# Altium PCB PCB.PcbDoc (part 1 of 4)
Units mm, origin at the board's own origin, x right, y up, seen from the top; angles counter-clockwise.
Board outline 86.25 x 140 mm, 4 copper layers (Top Layer, GND, PWR, Bottom Layer), stack 1.57 mm thick; 308 components, 255 nets, 1064 pads, 1223 vias.
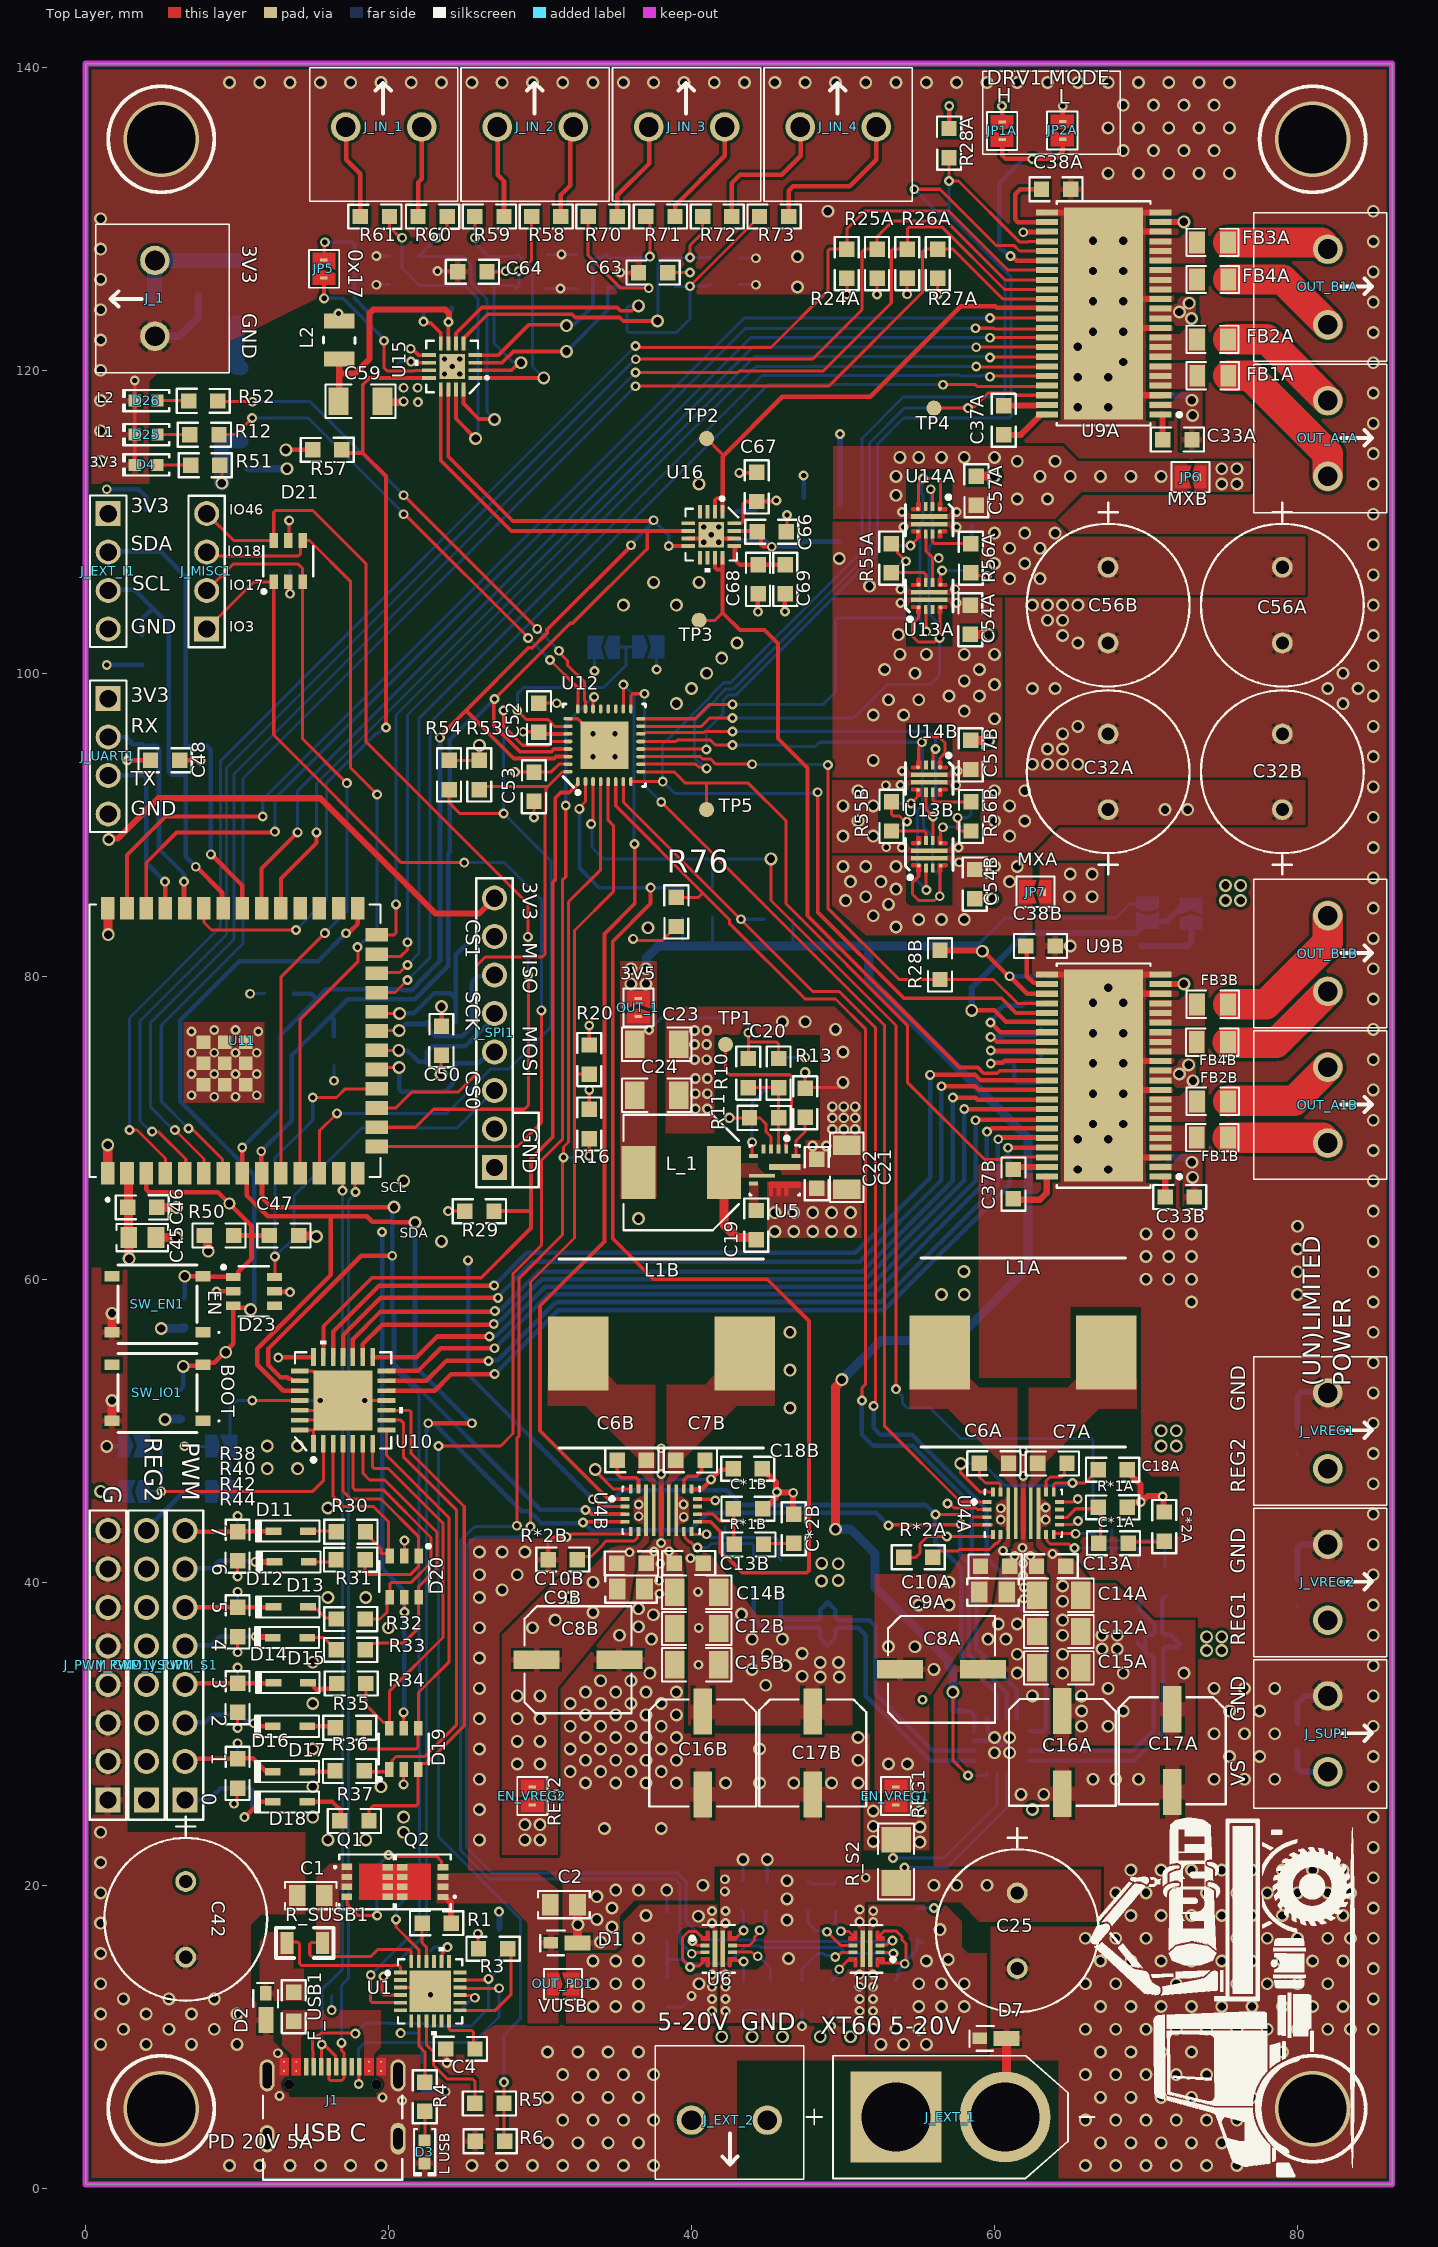
[diagram p0: Top Layer view]
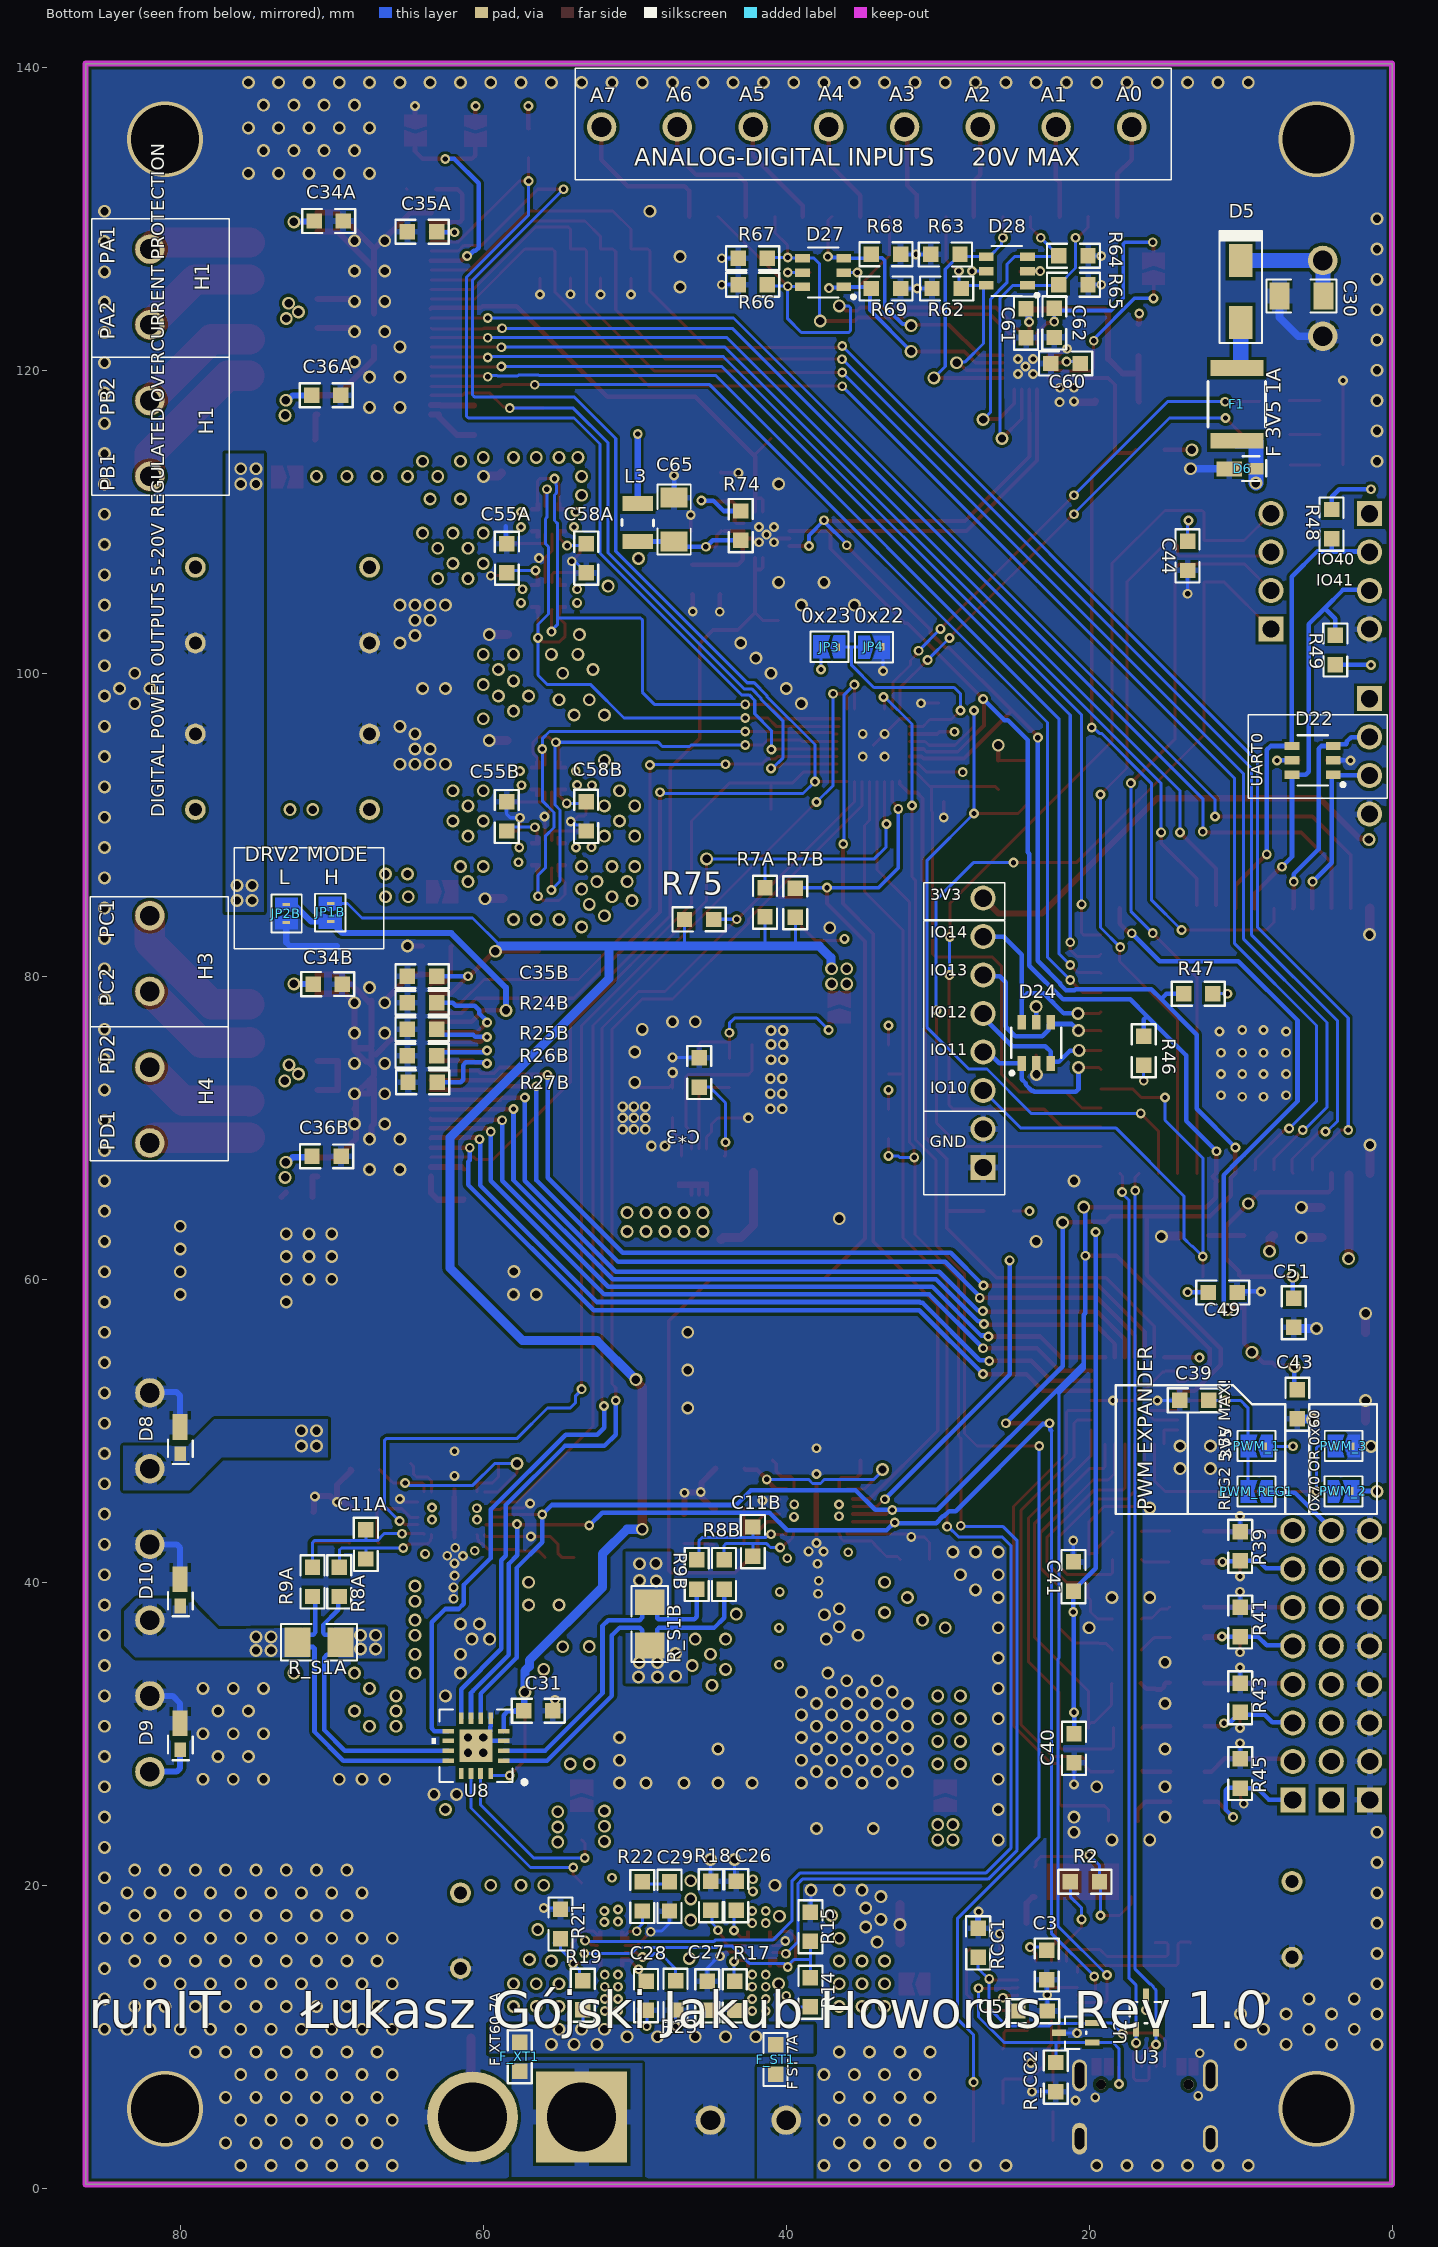
[diagram p1: Bottom Layer view, seen from below]
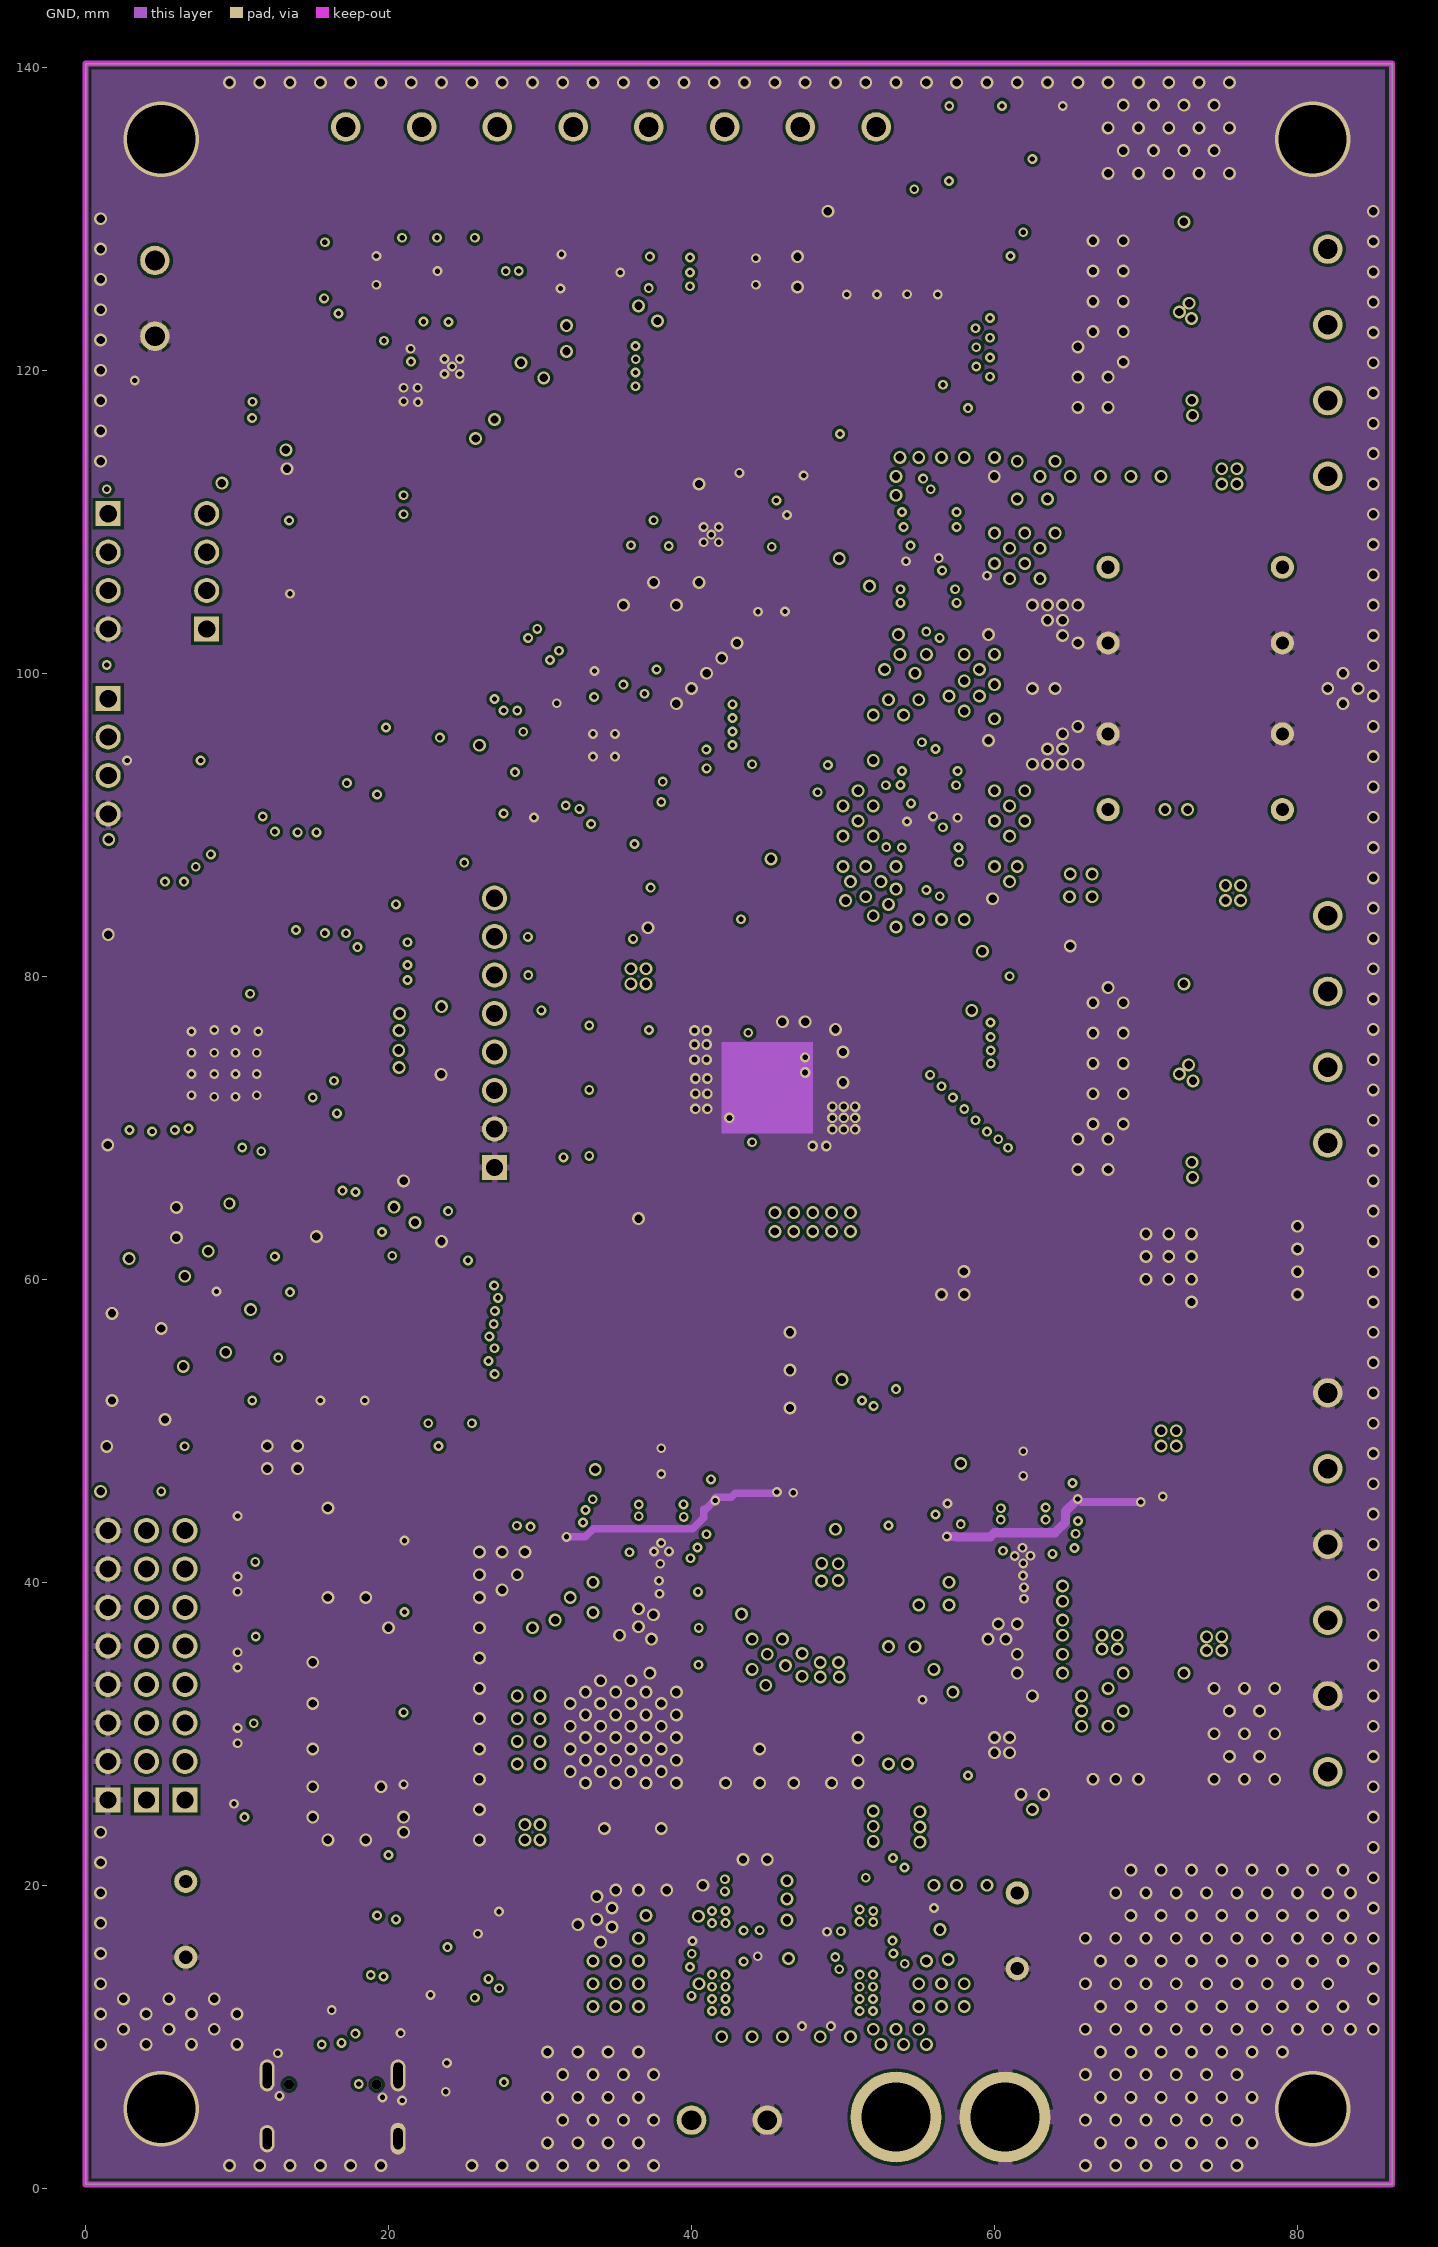
[diagram p2: GND]
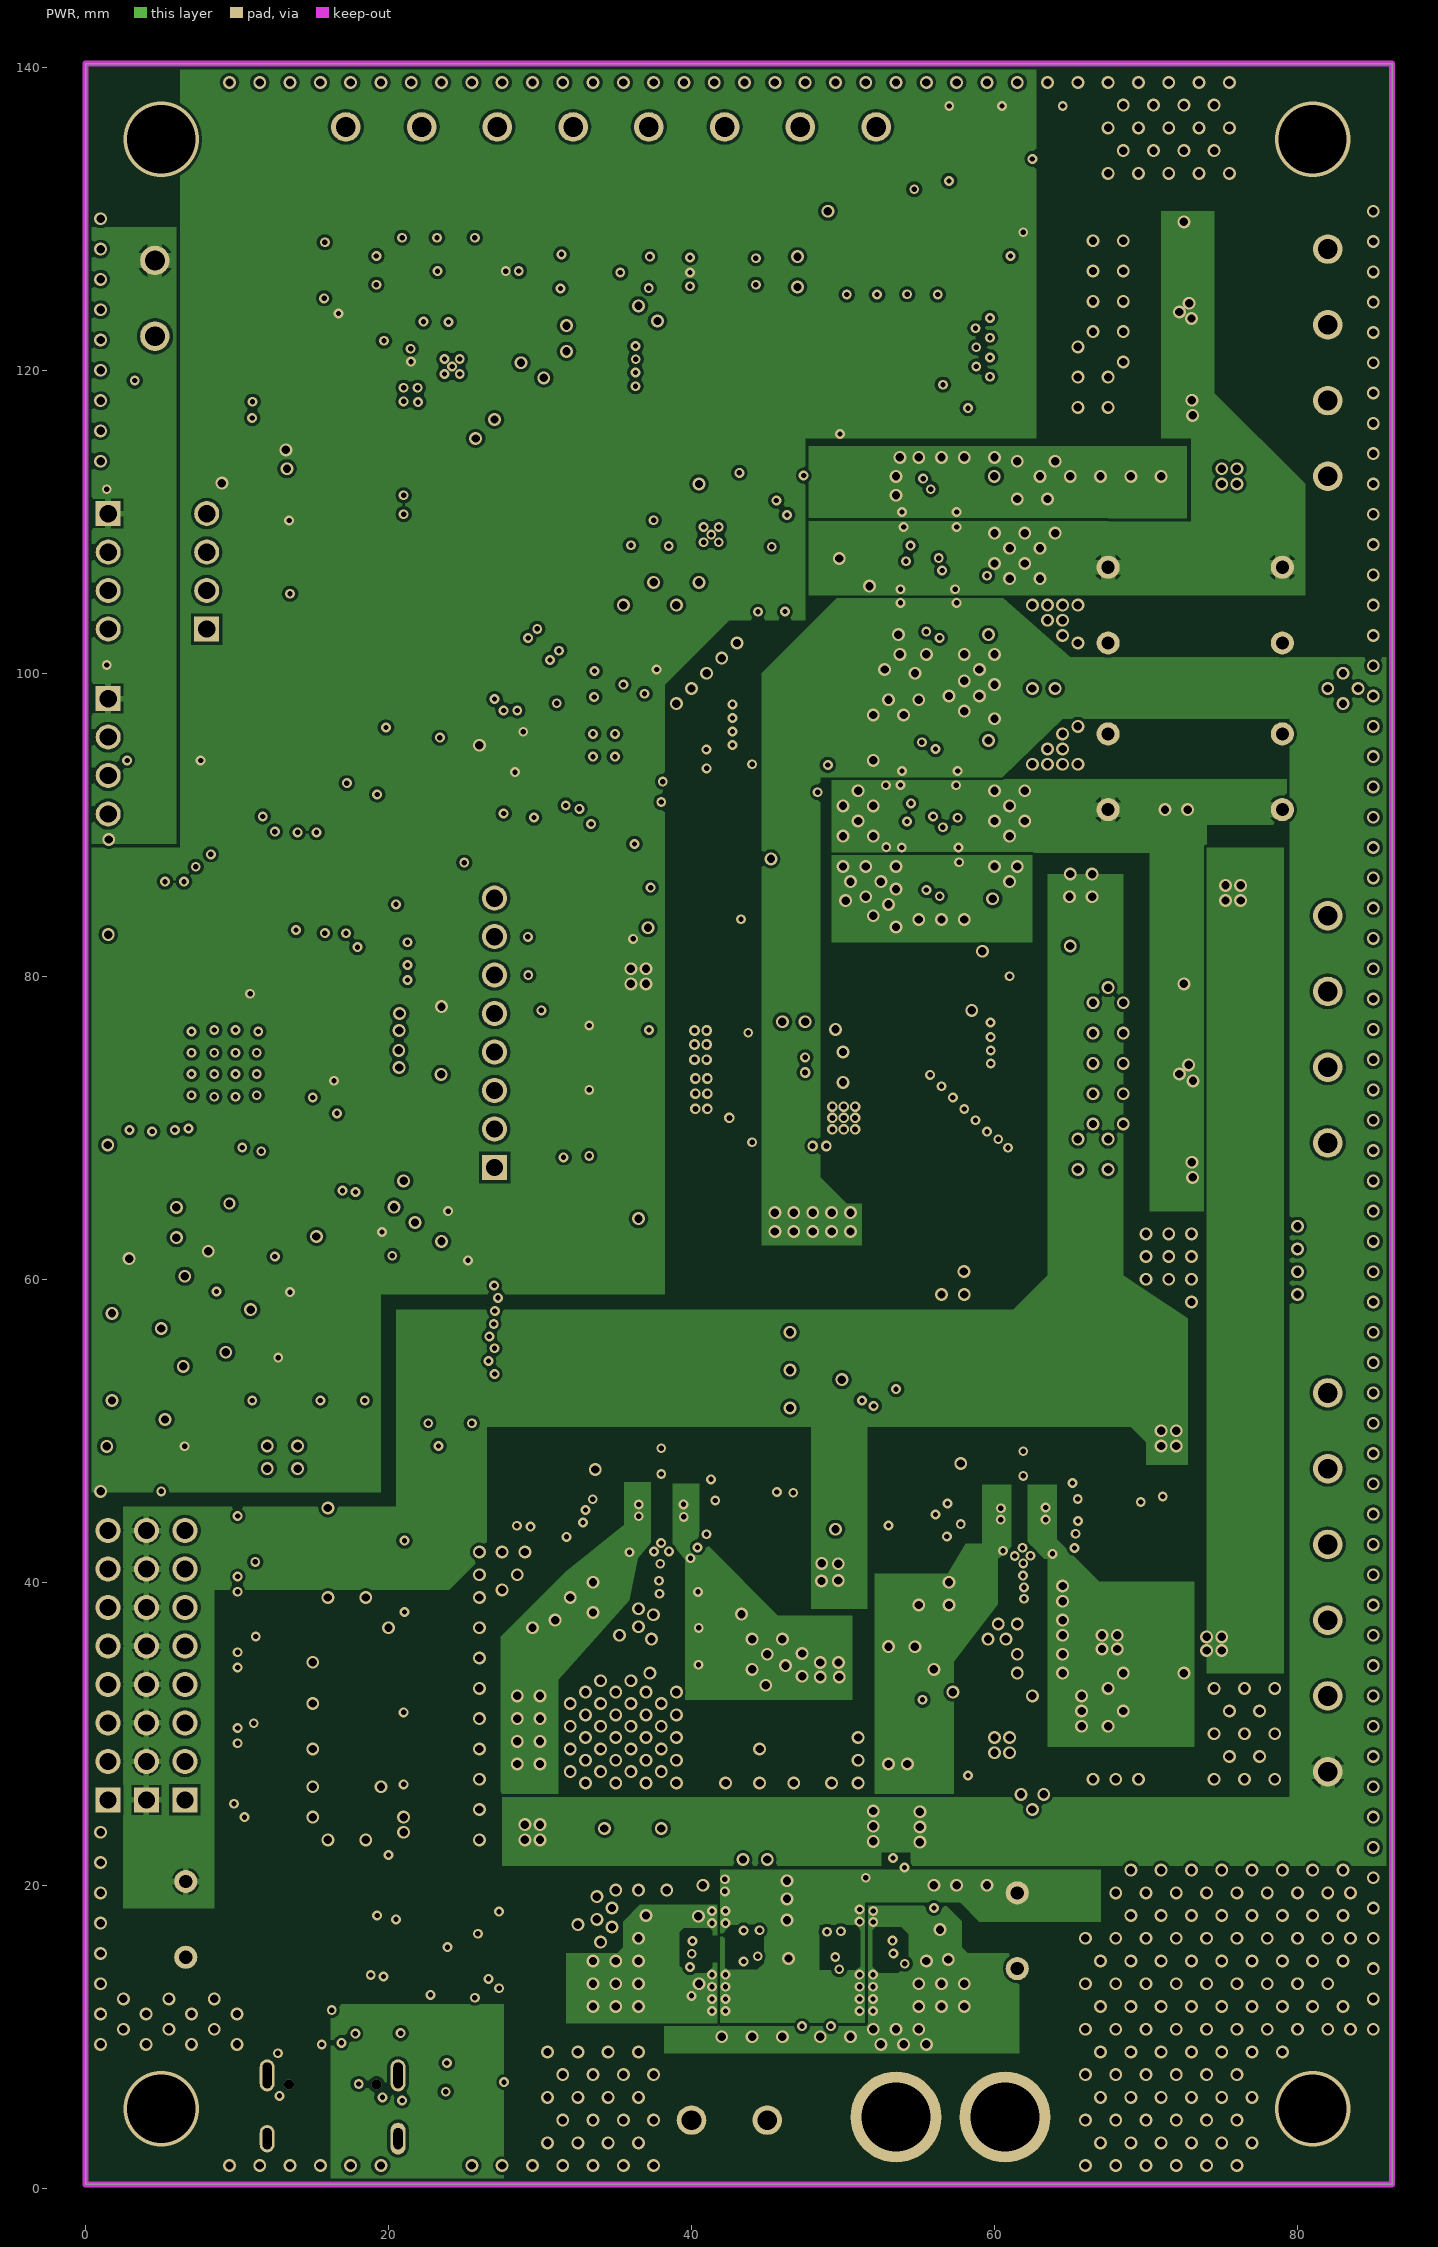
[diagram p3: PWR]

## Layer stack, top to bottom
Top Solder: solder mask 0.0127, Solder Resist, Dk 3.8
Top Layer: signal copper 0.035
Dielectric 1: prepreg 0.2, 7628, Dk 4.6
GND: signal copper 0.0175
Core: core 1.065, FR-4, Dk 4.5
PWR: signal copper 0.0175
Dielectric 2: prepreg 0.2, 7628, Dk 4.6
Bottom Layer: signal copper 0.035
Bottom Solder: solder mask 0.0127, Solder Resist, Dk 3.8

## Board outline
0,0.25 0,140.25 86.25,140.25 86.25,0.25

## Design rules (kind name [scope] priority, off if disabled: settings)
BoardOutlineClearance [All] p1: gap=0.2 ignorepadtopadclearanceinfootprint=FALSE
Clearance "Stitching GND" [IsStitchingVia and InNet('GND') vs (IsVia and (Not IsStitchingVia)) Or IsPad] p1: gap=0.127 ignorepadtopadclearanceinfootprint=FALSE
Clearance Clearance_safe [All] p2 off: gap=0.2 ignorepadtopadclearanceinfootprint=TRUE except(0.25: Arc-Hole Track-Hole SMDPad-Hole THPad-Hole Via-Hole Fill-Hole Poly-Hole Region-Hole Text-Hole)
Clearance Clearance_min [All] p3: gap=0.2 ignorepadtopadclearanceinfootprint=TRUE
ComponentClearance Allow_Goldpins_Touch [HasFootprint('GOLDPIN8') vs HasFootprint('GOLDPIN8')] p1: gap=-10 collisioncheckmode=3 verticalgap=2540 showdistances=FALSE
ComponentClearance Allow_TerminalBlock_Overlap [HasFootprint('TB00150002BE') vs HasFootprint('TB00150002BE')] p2: gap=-1 collisioncheckmode=3 verticalgap=0 showdistances=TRUE
ComponentClearance [All] p3: gap=0.254 collisioncheckmode=3 verticalgap=0.254 showdistances=FALSE
DiffPairsRouting [All] p1: maxlimit=0.2 minlimit=0.102 mostfreqgap=0.2 toplayer_mingap=0.2 toplayer_minwidth=0.2 toplayer_maxwidth=0.2 toplayer_prefwidth=0.2 midlayer1_maxgap=0.102 midlayer1_prefgap=0.102 midlayer1_minwidth=0.102 midlayer1_maxwidth=1816.048 midlayer1_prefwidth=0.102 midlayer2_maxgap=0.102 midlayer2_prefgap=0.102 midlayer2_minwidth=0.102 midlayer2_maxwidth=1816.048 midlayer2_prefwidth=0.102 bottomlayer_mingap=0.2 bottomlayer_minwidth=0.2 bottomlayer_maxwidth=1816.048 bottomlayer_prefwidth=0.2 maxuncoupledlength=20
Height [All] p1: minheight=0 maxheight=1816.048 prefheight=12.7
HoleSize [All] p1: absolutevalues=TRUE maxlimit=6.3 minlimit=0.15 maxpercent=80.000 minpercent=20.000
HoleToHoleClearance [All] p1: gap=0.25 allowstackedmicrovias=FALSE
MinimumAnnularRing [All] p1: minimumring=0.076
MinimumSolderMaskSliver [All] p1: minsoldermaskwidth=0
PlaneClearance [All] p1: clearance=0.2
PlaneConnect PlaneConnectPowerPads [InPadClass('PowerPads')] p1: planeconnectstyle=Relief reliefexpansion=0.5 reliefentries=4 reliefconductorwidth=0.4 reliefairgap=0.2
PlaneConnect [All] p2: pad.planeconnectstyle=Relief pad.reliefexpansion=0.3 pad.reliefentries=4 pad.reliefconductorwidth=0.2 pad.reliefairgap=0.15 via.planeconnectstyle=Direct via.reliefexpansion=0.3 via.reliefentries=4 via.reliefconductorwidth=0.127 via.reliefairgap=0.127
PolygonConnect ThickRelief [InComponentClass('ThickRelief')] p1: connectstyle=Relief reliefconductorwidth=1 reliefentries=4 polygonreliefangle="90 Angle" airgapwidth=0.2
PolygonConnect NoRelief [InComponentClass('NoRelief') or InNetClass('NoRelief')] p2: connectstyle=Direct reliefconductorwidth=0.254 reliefentries=4 polygonreliefangle="90 Angle" airgapwidth=0.254
PolygonConnect [All] p3: thpad.connectstyle=Relief thpad.reliefconductorwidth=0.4 thpad.reliefentries=4 thpad.polygonreliefangle="90 Angle" thpad.airgapwidth=0.15 smdpad.connectstyle=Relief smdpad.reliefconductorwidth=0.4 smdpad.reliefentries=4 smdpad.polygonreliefangle="90 Angle" smdpad.airgapwidth=0.15 via.connectstyle=Direct via.reliefconductorwidth=0.127 via.reliefentries=4 via.polygonreliefangle="90 Angle" via.airgapwidth=0.127
RoutingVias [All] p1: holewidth=0.2 width=0.45 viastyle="Through Hole" minholewidth=0.2 minwidth=0.45 maxholewidth=6.3 maxwidth=6.55 useviatemplates=TRUE viatemplateguid#1={DA2336AB-9EE1-42C0-B4EB-EEFE38A68F2F} viatemplateguid#2={69EF2BE2-FA67-4AE6-AD14-36ABDEFA9701} viatemplateguid#3={F5F8646A-B85C-411E-B132-6DA59EF91172} viatemplateguid#4={20139CD2-3775-4FF3-896C-B932126DD5CB} viatemplateguid#5={35EC4184-2AF1-43B1-8B47-92FEBE44A689} viatemplateguid#6={49529E18-D0F9-4CDD-B76F-9509D48BAFF8} viatemplateguid#7={257BA990-31CA-43FC-BEBF-376A746D3807} viatemplateguid#8={25DE39C3-E142-4D64-BFA4-EC6DFACA42F5} viatemplateguid#9={28B9241F-3887-4C48-A3F2-6E28A5437EB9} viatemplateguid#10={49A2742D-C476-47F7-8F4A-12AA83032560} viatemplateguid#11={26537D52-CFC4-4288-9BF3-B7A44E277D99} viatemplatename#1=v65h35m0mx0 viatemplatename#2=v65h35m75 viatemplatename#3=v65h35m75mx0 viatemplatename#4=v70h40m0 viatemplatename#5=v70h40m0mx0 viatemplatename#6=v70h40m80 viatemplatename#7=v70h40m80mx0 viatemplatename#8=v80h50m0mx0 viatemplatename#9=v85h55m0mx0 viatemplatename#10=v85h55m95 viatemplatename#11=v85h55m95mx0
SilkToSilkClearance [All] p1: silktosilkclearance=0
SilkToSolderMaskClearance [IsPad] p1: minsilkscreentomaskgap=0.1 clearancetoexposedcopper=TRUE
SolderMaskExpansion SolderMaskExpansion_safe [All] p1: expansion=0.15 istentingtop=FALSE
SolderMaskExpansion SolderMaskExpansion_min [All] p2: expansion=0.075 istentingtop=FALSE
SupplyNets "Schematic Supply Nets_11" [InNet('VREG')] p1: voltage=0.000
SupplyNets "Schematic Supply Nets_10" [InNet('VSUP')] p2: voltage=0.000
SupplyNets "Schematic Supply Nets_8" [InNet('VREG5')] p3: voltage=0.000
SupplyNets "Schematic Supply Nets" [InNet('3V3PROT')] p4: voltage=0.000
SupplyNets "Schematic Supply Nets_2" [InNet('3V5')] p5: voltage=0.000
SupplyNets "Schematic Supply Nets_1" [InNet('GND')] p6: voltage=0.000
Width Width_safe [All] p1: maxlimit=1816.048 minlimit=0.2 preferedwidth=0.2 toplayer_maxwidth=10 bottomlayer_maxwidth=10 minimp=50.000000 maximp=50.000000 favimp=50.000000
20 further rules are at their usual default settings.

## Classes and differential pairs
component class ThickRelief: C16A C16B C17A C17B C30 C32A C32B C56A C56B D8 D9 D10 J_1 J_EXT_1 J_EXT_2 J_SUP1 J_VREG1 J_VREG2 OUT_A1A OUT_A1B OUT_B1A OUT_B1B s
net class NoRelief: VEXT_PROT VSUP_SENS+ VUSB
component class NoRelief: C1 C2 C6A C6B C7A C7B C9A C9B C10A C10B C12A C12B C13A C13B C14A C14B C15A C15B C19 C20 C21 C22 C23 C24 C37A C37B C54A C54B C57A C57B F_ST1 F_USB1 F_XT1 FB1A FB1B FB2A FB2B FB3A FB3B FB4A FB4B J1 L1A L1B L_1 OUT_PD1 Q1 Q2 R1 R_S1A R_S1B R_S2 R_SUSB1 U4A U4B U5 U9A U9B U11 U13A U13B U14A U14B
component class U_PowerOutputsAssembly: JP6 JP7 TP2 TP3 TP4 TP5
channel class MuxVM: U_MuxVM_1 U_MuxVM_2
channel class DRVPowerOutputs: DRV1 DRV2
channel class DCDCreg: Reg Reg5
net class P[0..27]: DRVs_OCPM INT_3V P0 P1 P2 P3 P4 P5 P6 P10 P11 P12 P13 P14 P15 P16 P17 P20 P21 P22 P23 P24 P26 P27
component class U_USBPD: C1 C2 C3 C4 C5 D1 D2 D3 DRV1 DRV2 F_USB1 J1 OUT_PD1 Q1 Q2 R1 R2 R3 R4 R5 R6 R_CC2 R_SUSB1 RCC1 U1 U2 U3
component class U_PWMExpander: C39 C40 C41 C42 D11 D12 D13 D14 D15 D16 D17 D18 D19 D20 J_PWM_GND1 J_PWM_S1 J_PWM_VSUP1 PWM_1 PWM_2 PWM_3 PWM_REG1 R29 R30 R31 R32 R33 R34 R35 R36 R37 R38 R39 R40 R41 R42 R43 R44 R45 U10
component class DRV2: C32B C33B C34B C35B C36B C37B C38B FB1B FB2B FB3B FB4B JP1_U_PowerIO_2 JP1B JP2B OUT_A1B OUT_B1B R24B R25B R26B R27B R28B s U9B
component class DRV1: C32A C33A C34A C35A C36A C37A C38A FB1A FB2A FB3A FB4A JP1A JP2A OUT_A1A OUT_B1A R24A R25A R26A R27A R28A U9A
component class U_PowerAssembly: C25 C26 C27 C28 C29 C30 C31 D5 D6 D7 D8 D9 D10 EN_VREG1 EN_VREG2 F1 F_ST1 F_XT1 J_1 J_EXT_1 J_EXT_2 J_SUP1 J_VREG1 J_VREG2 OUT_1 R14 R15 R16 R17 R18 R19 R20 R21 R22 R23 R75 R76 R_S2 U6 U7 U8
component class U_MuxVM_2: C54B C55B C56B C57B C58B R55B R56B U13B U14B
component class U_MuxVM_1: C54A C55A C56A C57A C58A R55A R56A U13A U14A
component class U_MCU: C43 C44 C45 C46 C47 C48 C49 C50 C51 D21 D22 D23 D24 J_EXT_I1 J_MISC1 J_SPI1 J_UART1 R46 R47 R48 R49 R50 SW_EN1 SW_IO1 U11
component class U_GPIOExpander: C52 C53 D25 D26 JP3 JP4 R51 R52 R53 R54 U12
component class Reg: C6A C7A C8A C9A C10A C11A C12A C13A C14A C15A C16A C17A C18A C*1A C*2A L1A R7A R8A R9A R*1A R*2A R_S1A U4A
component class Reg5: C6B C7B C8B C9B C10B C11B C12B "C13 25V" C13B C14B C15B C16B C17B C18B C*1B C*2B L1B R7B R8B R9B R*1B R*2B R_S1B U4B
component class U_DCDC3: C19 C20 C21 C22 C23 C24 C*3 D4 L_1 R10 R11 R12 R13 TP1 U5
component class U_DAC: C65 C66 C67 C68 C69 L3 R74 U16
component class U_ADCHighVoltageInputsSchDoc: C59 C60 C61 C62 C63 C64 D27 D28 J_IN_1 J_IN_2 J_IN_3 J_IN_4 JP5 L2 R57 R58 R59 R60 R61 R62 R63 R64 R65 R66 R67 R68 R69 R70 R71 R72 R73 U15
differential pair USB_D: +USB_D_P -USB_D_N

## Components (designator, comment, footprint, x,y, rotation, side; value= is the part's Value field where it differs from the comment)
C1 "10u 25V" C_0805 14.867,19.323 r180 top value=10u
C2 "10u 25V" C_0805 31.575,18.718 r180 top value=10u
C3 "1uF_10V" C_0603 22.796,14.738 r90 bottom value=1u
C4 "100n 10V" C_0603 24.745,9.192 r0 top value=100n
C5 "100n 25V" C_0603 23.738,11.704 r0 bottom value=100n
C6A "100n 25V" C_0603 59.962,47.846 r0 top locked value=100n (schematic designator C6)
C6B "100n 25V" C_0603 36.062,48.046 r0 top locked value=100n (schematic designator C6)
C7A "100n 25V" C_0603 63.825,47.85 r180 top locked value=100n (schematic designator C7)
C7B "100n 25V" C_0603 39.925,48.05 r180 top locked value=100n (schematic designator C7)
C8A "A768EB107M1ELAS036" CAP_A768EB_6.8X6.8_KEM 56.5,34.25 r0 top locked value=100uF (schematic designator C8)
C8B "A768EB107M1ELAS036" CAP_A768EB_6.8X6.8_KEM 32.507,34.896 r0 top value=100uF (schematic designator C8)
C9A "10u 25V" C_0805 59.9,39.35 r180 top value=10u (schematic designator C9)
C9B "10u 25V" C_0805 36,39.55 r180 top value=10u (schematic designator C9)
C10A "1uF 25V" C_0603 60.038,41.054 r180 top value=1u (schematic designator C10)
C10B "1uF 25V" C_0603 36.038,41.254 r180 top value=1u (schematic designator C10)
C11A "220nF 25V" C_0603 67.75,42.5 r270 bottom locked value=220n (schematic designator C11)
C11B "220nF 25V" C_0603 42.204,42.688 r270 bottom locked value=220n (schematic designator C11)
C12A "22u 25V" C_1206 64.25,36.75 r0 top value=22u (schematic designator C12)
C12B "22u 25V" C_1206 40.35,36.95 r0 top value=22u (schematic designator C12)
C13A "1uF 25V" C_0603 63.738,41.046 r0 top value=1u (schematic designator C13)
C13B "1uF 25V" C_0603 39.821,41.265 r0 top value=1u (schematic designator C13)
C14A "22u 25V" C_1206 64.25,39.15 r0 top value=22u (schematic designator C14)
C14B "22u 25V" C_1206 40.35,39.35 r0 top value=22u (schematic designator C14)
C15A "22u 25V" C_1206 64.25,34.35 r0 top value=22u (schematic designator C15)
C15B "22u 25V" C_1206 40.35,34.55 r0 top value=22u (schematic designator C15)
C16A "A768EB107M1ELAS036" CAP_A768EB_6.8X6.8_KEM 64.482,28.771 r270 top value=100uF (schematic designator C16)
C16B "A768EB107M1ELAS036" CAP_A768EB_6.8X6.8_KEM 40.75,28.73 r270 top value=100uF (schematic designator C16)
C17A "A768EB107M1ELAS036" CAP_A768EB_6.8X6.8_KEM 71.736,28.887 r270 top value=100uF (schematic designator C17)
C17B "A768EB107M1ELAS036" CAP_A768EB_6.8X6.8_KEM 48,28.73 r270 top value=100uF (schematic designator C17)
C18A "4u7 16V" C_0603 67.8,47.439 r180 top value=4u7 (schematic designator C18)
C18B "4u7 16V" C_0603 43.712,47.504 r180 top value=4u7 (schematic designator C18)
C19 "100n 10V" C_0603 44.287,63.578 r90 top value=100n
C20 "120pF 10V" C_0603 45.754,73.612 r90 top locked value=120p
C21 "22u 25V" C_1206 50.25,67.4 r270 top locked value=22u
C22 "100n 25V" C_0603 48.267,66.974 r270 top value=100n
C23 "22u 10V" C_1206 37.7,75.517 r180 top locked value=22u
C24 "22u 10V" C_1206 37.7,72.15 r180 top locked value=22u
C25 "35PX470MEFC10X12.5" CAP_PKPZ_10X12P5_LOW_RUB 61.5,19.5 r270 top value=470u
C26 "22n 25V" C_0603 43.298,19.316 r270 bottom value=22n
C27 "22n 25V" C_0603 45.218,12.702 r270 bottom value=22n
C28 "22n 25V" C_0603 49.246,12.713 r90 bottom value=22n
C29 "22n 25V" C_0603 47.696,19.262 r90 bottom value=22n
C30 "22u 25V" C_1206 5.989,124.906 r180 bottom value=22u
C31 "1uF_10V" C_0603 56.369,31.525 r0 bottom locked value=1u
C32A "35PX470MEFC10X12.5" CAP_PKPZ_10X12P5_LOW_RUB 67.5,107 r270 top value=470u (schematic designator C32)
C32B "35PX470MEFC10X12.5" CAP_PKPZ_10X12P5_LOW_RUB 79,91 r90 top value=470u (schematic designator C32)
C33A "1uF 25V" C_0603 72.071,115.424 r0 top value=1u (schematic designator C33)
C33B "1uF 25V" C_0603 72.231,65.427 r0 top value=1u (schematic designator C33)
C34A "10nF 35V" 0603_CAP 70.2,129.85 r180 bottom value=10nF (schematic designator C34)
C34B "10nF 35V" 0603_CAP 70.267,79.476 r180 bottom value=10nF (schematic designator C34)
C35A "1uF_10V" C_0603 64.038,129.146 r180 bottom value=1u (schematic designator C35)
C35B "1uF_10V" C_0603 64.038,79.996 r180 bottom value=1u (schematic designator C35)
C36A "10nF 35V" 0603_CAP 70.362,118.346 r180 bottom value=10nF (schematic designator C36)
C36B "10nF 35V" 0603_CAP 70.338,68.106 r180 bottom value=10nF (schematic designator C36)
C37A "100n 25V" C_0603 60.6,116.7 r270 top value=100n (schematic designator C37)
C37B "100n 25V" C_0603 61.246,66.288 r270 top value=100n (schematic designator C37)
C38A "1uF_10V" C_0603 64.062,131.954 r180 top locked value=1u (schematic designator C38)
C38B "1uF_10V" C_0603 63.038,82.004 r180 top value=1u (schematic designator C38)
C39 "1uF_10V" C_0603 13.068,52 r180 bottom value=1u
C40 "100n 10V" C_0603 20.996,29.038 r90 bottom locked value=100n
C41 "100n 10V" C_0603 21.04,40.38 r270 bottom value=100n
C42 "35PX470MEFC10X12.5" CAP_PKPZ_10X12P5_LOW_RUB 6.614,20.25 r270 top value=470u
C43 "100n 25V" C_0603 6.25,51.75 r90 bottom value=100n
C44 "100n 25V" C_0603 13.5,107.75 r90 bottom value=100n
C45 "10u 10V" C_0805 3.75,62.75 r180 top value=10u
C46 "100n 10V" C_0603 3.75,64.75 r180 top value=100n
C47 "1uF_10V" C_0603 13.1,62.893 r180 top value=1u
C48 "100n 25V" C_0603 5.25,94.25 r0 top value=100n
C49 "100n 25V" C_0603 11.183,59.133 r0 bottom value=100n
C50 "100n 25V" C_0603 23.5,75.75 r90 top value=100n
C51 "100n 25V" C_0603 6.496,57.788 r90 bottom value=100n
C52 "1uF_10V" C_0603 29.923,97.062 r270 top value=1u
C53 "1uF_10V" C_0603 29.604,92.512 r90 top value=1u
C54A "1uF 25V" C_0603 58.414,103.533 r90 top value=1u (schematic designator C54)
C54B "1uF 25V" C_0603 58.704,86.088 r90 top value=1u (schematic designator C54)
C55A "3n3 25V" C_0603 58.444,107.6 r270 bottom value=3n3 (schematic designator C55)
C55B "3n3 25V" C_0603 58.454,90.55 r270 bottom value=3n3 (schematic designator C55)
C56A "35PX470MEFC10X12.5" CAP_PKPZ_10X12P5_LOW_RUB 79,107 r270 top value=470u (schematic designator C56)
C56B "35PX470MEFC10X12.5" CAP_PKPZ_10X12P5_LOW_RUB 67.5,91 r90 top value=470u (schematic designator C56)
C57A "1uF 25V" C_0603 58.8,112.05 r270 top value=1u (schematic designator C57)
C57B "1uF 25V" C_0603 58.421,94.613 r270 top locked value=1u (schematic designator C57)
C58A "3n3 25V" C_0603 53.19,107.6 r90 bottom value=3n3 (schematic designator C58)
C58B "3n3 25V" C_0603 53.2,90.55 r90 bottom value=3n3 (schematic designator C58)
C59 "22u 10V" C_1206 18.15,117.95 r180 top value=22u
C60 "1uF_10V" C_0603 21.562,120.446 r180 bottom value=1u
C61 "1uF_10V" C_0603 24.165,123.112 r90 bottom value=1u
C62 "1uF_10V" C_0603 22.291,123.127 r90 bottom value=1u
C63 "100n 10V" C_0603 37.462,126.446 r0 top value=100n
C64 "100n 10V" C_0603 25.538,126.496 r0 top value=100n
C65 "22u 10V" C_1206 47.4,110.15 r270 bottom value=22u
C66 "1uF_10V" C_0603 45.3,109.35 r180 top value=1u
C67 "100n 10V" C_0603 44.3,112.3 r270 top value=100n
C68 "1uF_10V" C_0603 44.4,106.2 r90 top value=1u
C69 "1uF_10V" C_0603 46.2,106.2 r90 top value=1u
C*1A "120pF 10V" C_0603 67.8,44.95 r180 top value=120p (schematic designator C*1)
C*1B "120pF 10V" C_0603 43.731,44.868 r180 top value=120p (schematic designator C*1)
C*2A "4u7 16V" C_0603 71.2,43.675 r270 top value=4u7 (schematic designator C*2)
C*2B "4u7 16V" C_0603 46.746,43.538 r270 top value=4u7 (schematic designator C*2)
C*3 "100n 10V" C_0603 45.75,73.65 r270 bottom locked value=100n
D1 "MSMP20A-M3/89A" CR_0A-M389A_VIS 31.772,16.205 r0 top value=22V
D2 "MSMP20A-M3/89A" CR_0A-M389A_VIS 11.9,11.797 r270 top value=22V
D3 "RED" LED_0603 22.385,2.393 r270 top
D4 "RED" LED_0603 4,113.75 r180 top
D5 "SL12-E3/61T" DIONM5127X229N 10,125.2 r270 bottom locked
D6 "MSMP20A-M3/89A" CR_0A-M389A_VIS 10.053,113.5 r0 bottom locked value=22V
D7 "MSMP20A-M3/89A" CR_0A-M389A_VIS 60.1,9.9 r0 top value=22V
D8 "MSMP20A-M3/89A" CR_0A-M389A_VIS 80,49.553 r90 bottom value=22V
D9 "MSMP20A-M3/89A" CR_0A-M389A_VIS 80,30 r90 bottom value=22V
D10 "MSMP20A-M3/89A" CR_0A-M389A_VIS 80,39.5 r90 bottom value=22V
D11 "CUS520,H3F" SOD2513X115N 13.54,43.38 r0 top
D12 "CUS520,H3F" SOD2513X115N 13.6,41.35 r0 top
D13 "CUS520,H3F" SOD2513X115N 13.54,38.38 r0 top
D14 "CUS520,H3F" SOD2513X115N 13.5,36.35 r0 top
D15 "CUS520,H3F" SOD2513X115N 13.54,33.38 r0 top
D16 "CUS520,H3F" SOD2513X115N 13.5,30.5 r0 top
D17 "CUS520,H3F" SOD2513X115N 13.5,27.5 r0 top
D18 "CUS520,H3F" SOD2513X115N 13.5,25.5 r0 top
D19 "USBLC6-4SC6" SOT23-6L_STM 21,29 r90 top locked
D20 "USBLC6-4SC6" SOT23-6L_STM 21.04,40.38 r270 top
D21 "USBLC6-4SC6" SOT23-6L_STM 13.375,107.4 r90 top locked
D22 "USBLC6-4SC6" SOT23-6L_STM 5.25,94.25 r0 bottom
D23 "USBLC6-4SC6" SOT23-6L_STM 11.112,59.2 r0 top
D24 "USBLC6-4SC6" SOT23-6L_STM 23.5,75.612 r90 bottom locked
D25 "RED" LED_0603 4,115.75 r180 top
D26 "RED" LED_0603 4,118 r180 top
D27 "USBLC6-4SC6" SOT23-6L_STM 37.562,126.45 r0 bottom locked
D28 "USBLC6-4SC6" SOT23-6L_STM 25.438,126.55 r0 bottom locked
EN_VREG1 "JUMPER" JUMPER 53.5,25.949 r90 top locked
EN_VREG2 "JUMPER" JUMPER 29.499,25.949 r90 top
F1 "SD110-08" 1812 10.25,117.75 r270 bottom locked
F_ST1 "0686F7000-01" 0603_FUSE 40.7,8.5 r90 bottom
F_USB1 "0686F7000-01" 0603_FUSE 13.748,11.98 r90 top
F_XT1 "0686F7000-01" 0603_FUSE 57.577,8.68 r90 bottom locked
FB1A "MH2029-300T" MH2029-300T 74.406,119.64 r0 top locked (schematic designator FB1)
FB1B "MH2029-300T" MH2029-300T 74.375,69.35 r0 top (schematic designator FB1)
FB2A "MH2029-300T" MH2029-300T 74.39,122.041 r0 top locked (schematic designator FB2)
FB2B "MH2029-300T" MH2029-300T 74.4,71.75 r0 top (schematic designator FB2)
FB3A "MH2029-300T" MH2029-300T 74.39,128.441 r0 top locked (schematic designator FB3)
FB3B "MH2029-300T" MH2029-300T 74.4,78.15 r0 top (schematic designator FB3)
FB4A "MH2029-300T" MH2029-300T 74.403,125.994 r0 top locked (schematic designator FB4)
FB4B "MH2029-300T" MH2029-300T 74.375,75.65 r0 top (schematic designator FB4)
J1 "USB4105-GF-A-120." CONN_USB4105-XX-A-XXX_GCT 16.313,4.352 r0 top locked
J_1 "TB001-500-02BE" TB00150002BE 4.581,127.25 r270 top locked
J_EXT_1 "XT60U-M" XT60U-M 57.1,4.7 r0 top locked
J_EXT_2 "TB001-500-02BE" TB00150002BE 40,4.5 r0 top locked
J_EXT_I1 "Goldpin" GOLDPIN4 1.5,110.54 r270 top
J_IN_1 "TB001-500-02BE" TB00150002BE 22.185,136.063 r180 top locked
J_IN_2 "TB001-500-02BE" TB00150002BE 32.185,136.063 r180 top locked
J_IN_3 "TB001-500-02BE" TB00150002BE 42.185,136.063 r180 top locked
J_IN_4 "TB001-500-02BE" TB00150002BE 52.185,136.063 r180 top locked
J_MISC1 "Goldpin" GOLDPIN4 8,102.92 r90 top
J_PWM_GND1 "Goldpin" GOLDPIN8 1.482,25.635 r90 top locked
J_PWM_S1 "Goldpin" GOLDPIN8 6.562,25.635 r90 top locked
J_PWM_VSUP1 "Goldpin" GOLDPIN8 4.022,25.635 r90 top locked
J_SPI1 "Goldpin" GOLDPIN8 27,67.38 r90 top locked
J_SUP1 "TB001-500-02BE" TB00150002BE 82,27.5 r90 top
J_UART1 "Goldpin" GOLDPIN4 1.5,98.33 r270 top
J_VREG1 "TB001-500-02BE" TB00150002BE 82,47.5 r90 top
J_VREG2 "TB001-500-02BE" TB00150002BE 82,37.5 r90 top
JP1A "JUMPER" JUMPER 60.5,135.75 r270 top locked (schematic designator JP1)
JP1B "JUMPER" JUMPER 70.1,84.15 r270 bottom (schematic designator JP1)
JP2A "JUMPER" JUMPER 64.475,135.775 r270 top locked (schematic designator JP2)
JP2B "JUMPER" JUMPER 72.975,84.2 r90 bottom (schematic designator JP2)
JP3 "JUMPER" JUMPER 37.2,101.75 r0 bottom
JP4 "JUMPER" JUMPER 34.15,101.725 r180 bottom
JP5 "JUMPER" JUMPER 15.75,126.75 r90 top
JP6 "JUMPER" JUMPER 72.883,112.952 r180 top
JP7 "JUMPER" JUMPER 62.65,85.575 r180 top
L1A "SRP1265A-4R7M" SRP1265A-4R7M 61.885,55.169 r0 top value=4u7 (schematic designator L1)
L1B "SRP1265A-4R7M" SRP1265A-4R7M 38.017,55.104 r0 top value=4u7 (schematic designator L1)
L2 "1mH" L_1007 16.75,122 r270 top
L3 "1mH" L_1007 49.8,109.95 r270 bottom
L_1 "DR74-2R2-R" DR74-2R2-R 39.325,67.05 r180 top locked value=2u2
OUT_1 "JUMPER" JUMPER 36.5,78 r90 top locked
OUT_A1A "TB001-500-02BE" TB00150002BE 82,113 r90 top locked (schematic designator OUT_A1)
OUT_A1B "TB001-500-02BE" TB00150002BE 82,69 r90 top locked (schematic designator OUT_A1)
OUT_B1A "TB001-500-02BE" TB00150002BE 82,123 r90 top locked (schematic designator OUT_B1)
OUT_B1B "TB001-500-02BE" TB00150002BE 82,79 r90 top locked (schematic designator OUT_B1)
OUT_PD1 "JUMPER" JUMPER 31.575,13.475 r0 top
PWM_1 "JUMPER" JUMPER 9,49 r0 bottom
PWM_2 "JUMPER" JUMPER 3.168,46 r180 bottom
PWM_3 "JUMPER" JUMPER 3.25,49 r0 bottom
PWM_REG1 "JUMPER" JUMPER 9,46 r0 bottom
Q1 "DMG7430LFG" POWERDI3333-8 18.55,20.225 r0 top
Q2 "DMG7430LFG" POWERDI3333-8 22.3,20.225 r180 top
R1 "27R" R_0603 23.177,17.499 r0 top
R2 "604R" R_0603 20.284,20.225 r180 bottom
R3 "10k" R_0603 26.9,15.8 r0 top
R4 "1k" R_0603 22.4,6.038 r90 top
R5 "1k" R_0603 26.662,5.6 r180 top
R6 "10k" R_0603 26.7,3.1 r0 top
R7A "100k" R_0603 41.4,84.888 r270 bottom locked (schematic designator R7)
R7B "100k" R_0603 39.4,84.85 r270 bottom locked (schematic designator R7)
R8A "10" R_0603 69.494,40.023 r90 bottom locked (schematic designator R8)
R8B "10" R_0603 44.1,40.512 r90 bottom locked (schematic designator R8)
R9A "10" R_0603 71.266,40.024 r90 bottom locked (schematic designator R9)
R9B "10" R_0603 45.9,40.512 r90 bottom locked (schematic designator R9)
R10 "48k7" R_0603 43.75,73.612 r90 top locked
R11 "10k" R_0603 44.788,70.65 r0 top locked
R12 "1k" R_0603 7.9,113.725 r0 top
R13 "10k" R_0603 47.5,71.65 r270 top locked
R14 "470k" R_0603 38.4,12.938 r270 bottom
R15 "169k" R_0603 38.4,17.262 r270 bottom
R16 "100k" R_0603 33.25,70.25 r90 top
R17 "100R" R_0603 43.4,12.7 r90 bottom
R18 "604R" R_0603 44.973,19.311 r270 bottom
R19 "470k" R_0603 53.425,12.738 r270 bottom
R20 "100k" R_0603 33.25,74.5 r90 top
R21 "169k" R_0603 54.899,17.446 r270 bottom
R22 "100R" R_0603 49.5,19.262 r270 bottom
R23 "604R" R_0603 47.3,12.727 r90 bottom
R24A "3k09" R_0603 50.25,127.038 r90 top locked (schematic designator R24)
R24B "3k09" R_0603 64.038,78.25 r180 bottom (schematic designator R24)
R25A "3k09" R_0603 52.25,127.038 r90 top locked (schematic designator R25)
R25B "3k09" R_0603 64.038,76.5 r180 bottom (schematic designator R25)
R26A "3k09" R_0603 54.25,127.038 r90 top locked (schematic designator R26)
R26B "3k09" R_0603 64.038,74.75 r180 bottom (schematic designator R26)
R27A "3k09" R_0603 56.25,127.038 r90 top locked (schematic designator R27)
R27B "3k09" R_0603 64,73 r180 bottom (schematic designator R27)
R28A "10k" R_0603 57,135 r270 top (schematic designator R28)
R28B "10k" R_0603 56.4,80.75 r270 top (schematic designator R28)
R29 "10k" R_0603 26,64.5 r180 top
R30 "220" R_0603 17.517,43.342 r180 top
R31 "220" R_0603 17.5,41.5 r180 top
R32 "220" R_0603 17.507,37.573 r180 top
R33 "220" R_0603 17.502,35.54 r180 top
R34 "220" R_0603 17.544,33.322 r180 top
R35 "220" R_0603 17.442,30.407 r180 top
R36 "220" R_0603 17.429,27.548 r180 top
R37 "220" R_0603 17.75,24.25 r180 top
R38 "10k" R_0603 10.04,42.38 r90 top
R39 "10k" R_0603 10.04,42.38 r270 bottom
R40 "10k" R_0603 10.04,37.38 r90 top
R41 "10k" R_0603 10.04,37.38 r270 bottom
R42 "10k" R_0603 10.04,32.38 r90 top
R43 "10k" R_0603 10.04,32.38 r270 bottom
R44 "10k" R_0603 10.04,27.38 r90 top locked
R45 "10k" R_0603 10.04,27.38 r270 bottom
R46 "3k09" R_0603 16.4,75.088 r270 bottom
R47 "3k09" R_0603 12.8,78.85 r180 bottom
R48 "5k1" R_0603 4,109.85 r90 bottom
R49 "5k1" R_0603 3.75,101.538 r270 bottom
R50 "10k" R_0603 8.813,62.89 r180 top
R51 "1k" R_0603 7.85,115.75 r0 top
R52 "1k" R_0603 7.775,117.975 r0 top
R53 "10k" R_0603 26,93.288 r90 top
R54 "10k" R_0603 24,93.288 r90 top
R55A "549" R_0603 53.19,107.6 r90 top (schematic designator R55)
R55B "549" R_0603 53.2,90.55 r90 top (schematic designator R55)
R56A "549" R_0603 58.44,107.6 r270 top (schematic designator R56)
R56B "549" R_0603 58.45,90.55 r270 top (schematic designator R56)
R57 "10k" R_0603 15.962,114.75 r180 top
R58 "51k" R_0603 30.412,130.15 r0 top locked
R59 "51k" R_0603 26.662,130.15 r0 top locked
R60 "51k" R_0603 22.912,130.15 r180 top locked
R61 "51k" R_0603 19.1,130.15 r180 top locked
R62 "10k" R_0603 29.412,125.4 r0 bottom locked
R63 "10k" R_0603 29.488,127.65 r0 bottom locked
R64 "10k" R_0603 21.038,127.55 r180 bottom locked
R65 "10k" R_0603 21.038,125.65 r180 bottom locked
R66 "10k" R_0603 42.212,125.65 r0 bottom locked
R67 "10k" R_0603 42.212,127.4 r0 bottom locked
R68 "10k" R_0603 33.412,127.65 r180 bottom locked
R69 "10k" R_0603 33.412,125.4 r180 bottom locked
R70 "51k" R_0603 34.138,130.15 r0 top locked
R71 "51k" R_0603 37.95,130.15 r0 top locked
R72 "51k" R_0603 41.7,130.15 r0 top locked
R73 "51k" R_0603 45.45,130.15 r0 top locked
R74 "10k" R_0603 43,109.75 r270 bottom
R75 "10k" R_0603 45.75,83.75 r180 bottom
R76 "10k" R_0603 39,84.25 r270 top
R*1A "27k4" R_0603 67.856,42.58 r180 top (schematic designator R*1)
R*1B "27k4" R_0603 43.788,42.5 r180 top (schematic designator R*1)
R*2A "48k7" R_0603 54.962,41.65 r0 top (schematic designator R*2)
R*2B "48k7" R_0603 31.5,41.5 r0 top (schematic designator R*2)
R_CC2 "5k1" R_0603 22.2,7.338 r90 bottom
R_S1A "PA1206FRE070R01Z" R_1206 70.837,36.033 r0 bottom locked value=10mR (schematic designator R_S1)
R_S1B "PA1206FRE070R01Z" R_1206 49,37.25 r90 bottom value=10mR (schematic designator R_S1)
R_S2 "PA1206FRE070R01Z" R_1206 53.5,21.575 r90 top locked value=10mR
R_SUSB1 "CRF0805-FZ-R005ELF" R_0805 14.475,16.2 r0 top value=5mR
RCC1 "5k1" R_0603 27.335,16.2 r270 bottom
SW_EN1 "PTS526 SM15 SMTR2 LFS" PTS526SK15SMTR2LFS 4.75,58.35 r180 top locked
SW_IO1 "PTS526 SM15 SMTR2 LFS" PTS526SK15SMTR2LFS 4.75,52.5 r180 top locked
TP1 "TP" TP 42.25,75.5 r90 top
TP2 "TP" TP 41,115.5 r90 top
TP3 "TP" TP 40.5,103.5 r90 top
TP4 "TP" TP 56,117.5 r90 top
TP5 "TP" TP 41,91 r90 top
U1 "AP33772SDKZ-13" W-QFN4040-24_TYPE_A1_DIO-M 22.75,13 r0 top locked
U2 "TPD2E2U06DCKR" DCK0003A-MFG 20.895,10.265 r0 bottom locked
U3 "TPD2E2U06DCKR" DCK0003A-MFG 16.25,11.6 r90 bottom locked
U4A "TPS55289RYQR" RYQ0021A-MFG 61.9,44.55 r0 top locked (schematic designator U4)
U4B "TPS55289RYQR" RYQ0021A-MFG 38,44.75 r0 top locked (schematic designator U4)
U5 "TPS56837RPAR" RPA0010A-MFG 45.5,67.2 r270 top locked
U6 "TPS259474LRPWR" RPW0010A-MFG 41.8,15.8 r0 top locked
U7 "TPS259474LRPWR" RPW0010A-MFG 51.55,15.8 r180 top locked
U8 "INA3221AIRGVR" RGV16_2P16X2P16 60.479,29.204 r0 bottom locked
U9A "DRV8962DDWR" DDW0044E-MFG 67.2,123.75 r180 top locked (schematic designator U9)
U9B "DRV8962DDWR" DDW0044E-MFG 67.2,73.45 r180 top locked (schematic designator U9)
U10 "IC_pca9685_PCA9685BS" PCA9685_SOT788-1 17,52 r90 top
U11 "ESP32-S3-WROOM-1U-N16R8" XCVR_ESP32-S3-WROOM-1U-N16R8 9.875,75.75 r90 top locked
U12 "TCA6424ARGJR" TCA6424A_RGJ0032A 34.25,95.25 r90 top locked
U13A "IC_lm73100_LM73100RPWR" LM73100_RPW0010A 55.69,105.1 r90 top locked (schematic designator U13)
U13B "IC_lm73100_LM73100RPWR" LM73100_RPW0010A 55.7,88.05 r90 top locked (schematic designator U13)
U14A "IC_lm73100_LM73100RPWR" LM73100_RPW0010A 55.69,110.1 r270 top locked (schematic designator U14)
U14B "IC_lm73100_LM73100RPWR" LM73100_RPW0010A 55.7,93.05 r270 top locked (schematic designator U14)
U15 "ADS7128IRTER" ADS7128_RTE0016C 24.2,120.25 r180 top locked
U16 "IC_dac53202_DAC53202RTER" DAC53202_RTE0016C 41.3,109.15 r270 top

## Footprints (in the part's own frame and the unit in brackets; to place one, negate y for a bottom-side part, rotate by r counter-clockwise, add the part's x,y. Pads: shape width x height; smd on the part's side, far side on the other; paste and mask are expansions set on the pad)
0603_CAP [mil]
  rect 40x40 smd: 1(-37.89,0.14) 2(37.89,0.14)
  silkscreen extent -69,-31 69,32, body extent -31,-16 31,16, height 28
0603_FUSE [mil]
  rect 40x40 smd: 1(-37.89,0) 2(37.89,0)
  silkscreen extent -69,-31 69,31, body extent -31,-15 31,15, height 30
1812 [mm] "1812"
  rect 1.05x3.5 smd: 1(-2.4,0) 2(2.4,0)
  silkscreen extent -1.5,-1.9 1.5,1.9, body extent -2.36,-1.71 2.36,1.71, height 0.7
ADS7128_RTE0016C [mm]
  rect 0.908x0.255 smd paste+0: 1(-1.521,0.75) 2(-1.521,0.25) 3(-1.521,-0.25) 4(-1.521,-0.75) 9(1.521,-0.75) 10(1.521,-0.25) 11(1.521,0.25) 12(1.521,0.75)
  rect 0.255x0.908 smd paste+0: 5(-0.75,-1.521) 6(-0.25,-1.521) 7(0.25,-1.521) 8(0.75,-1.521) 13(0.75,1.521) 14(0.25,1.521) 15(-0.25,1.521) 16(-0.75,1.521)
  rect 1.676x1.676 smd paste+0: 17(0,0)
  silkscreen extent -2.36,-1.7 2.48,1.78, body extent -1.58,-1.58 1.58,1.58, height 0.81
C_0603 [mil]
  rect 40x40 smd: 1(-37.89,0.14) 2(37.89,0.14)
  silkscreen extent -69,-31 69,32, body extent -31,-16 31,16, height 28
C_0805 [mm] "Chip Capacitor, 2-Leads, Body 2.00x1.20mm"
  rect 1.1x1.4 smd: 1(-0.9,0) 2(0.9,0)
  silkscreen extent -1.7,-0.9 1.7,0.9, body extent -1,-0.64 1,0.64, height 1.26
C_1206 [mm] "Chip Capacitor, 2-Leads, Body 3.25x1.60mm"
  rect 1.3x1.8 smd: 1(-1.45,0) 2(1.45,0)
  silkscreen extent -2.3,-1.1 2.3,1.1, body extent -1.6,-0.8 1.6,0.8, height 1
CAP_A768EB_6.8X6.8_KEM [mil]
  rect 120x48 smd paste+0: 1(-107.5,0) 2(107.5,0)
  silkscreen extent -139,-139 139,139, body extent -147,-134 147,134, height 238
CAP_PKPZ_10X12P5_LOW_RUB [mil]
  round 54 / inner round 60 / far side round 54 hole 34 paste-99999: 1(0,0) 2(196.85,0)
  silkscreen extent -168,-211 310,212, body extent -108,-206 306,206, height 552
CONN_USB4105-XX-A-XXX_GCT [mil]
  oval 39x83 hole 67 slot 24 at 0 deg paste-99999: 17(-170.08,122.06) 18(170.08,122.06)
  oval 39x71 hole 55 slot 24 at 0 deg paste-99999: 19(-170.08,-42.51)
  oval 39x83 hole 55 slot 24 at 0 deg paste-99999: 20(170.08,-42.51)
  round 26 hole 26 unplated paste-99999 mask+0: 21(-113.39,98.43) 22(114.17,98.43)
  rect 5x5 smd paste-2.5 mask-2.5: A1(-125.98,157.48) A4(-94.49,157.48) A9(94.49,133.86) A12(125.98,133.86) B1(125.98,157.48) B4(94.49,157.48) B9(-94.49,133.86) B12(-125.98,133.86)
  rect 12x45 smd paste-22.5: A5(-49.21,144.7) A6(-9.84,144.7) A7(9.84,144.7) A8(49.21,144.7) B5(68.9,144.7) B6(29.53,144.7) B7(-29.53,144.7) B8(-68.9,144.7)
  Top Layer region: 137.98,122.2 137.98,167.2 113.98,167.2 113.98,122.2
  Top Layer region: -113.98,122.2 -113.98,167.2 -137.98,167.2 -137.98,122.2
  Top Layer region: -82.49,122.2 -82.49,167.2 -106.49,167.2 -106.49,122.2
  Top Layer region: 106.49,122.2 106.49,167.2 82.49,167.2 82.49,122.2
  silkscreen extent -181,-149 181,69, body extent -177,-152 175,152, height 128
CR_0A-M389A_VIS [mil]
  rect 66.87x39 smd paste+0 mask+0: A(27.44,0)
  rect 37.87x30 smd paste+0 mask+0: K(-41.94,0)
  silkscreen extent -69,-32 -5,31, body extent -53,-27 53,27, height 29
DAC53202_RTE0016C [mm]
  rect 0.908x0.255 smd paste+0: 1(-1.521,0.75) 2(-1.521,0.25) 3(-1.521,-0.25) 4(-1.521,-0.75) 9(1.521,-0.75) 10(1.521,-0.25) 11(1.521,0.25) 12(1.521,0.75)
  rect 0.255x0.908 smd paste+0: 5(-0.75,-1.521) 6(-0.25,-1.521) 7(0.25,-1.521) 8(0.75,-1.521) 13(0.75,1.521) 14(0.25,1.521) 15(-0.25,1.521) 16(-0.75,1.521)
  rect 1.68x1.68 smd paste+0: 17(0,0)
  silkscreen extent -2.47,-1.7 2.48,1.78, body extent -1.58,-1.58 1.58,1.58, height 0.81
DCK0003A-MFG [mm]
  rect 0.95x0.4 smd paste+0: 1(-1.1,0.65) 2(-1.1,-0.65) 3(1.1,0)
  silkscreen extent -0.7,-1.07 0.7,1.07
DDW0044E-MFG [mm]
  rect 1.45x0.4 smd paste+0: 1(-3.75,6.667) 2(-3.75,6.032) 3(-3.75,5.397) 4(-3.75,4.762) 5(-3.75,4.127) 6(-3.75,3.492) 7(-3.75,2.857) 8(-3.75,2.222) 9(-3.75,1.587) 10(-3.75,0.952) 11(-3.75,0.317) 12(-3.75,-0.318) 13(-3.75,-0.953) 14(-3.75,-1.588) 15(-3.75,-2.223) 16(-3.75,-2.858) 17(-3.75,-3.493) 18(-3.75,-4.128) 19(-3.75,-4.763) 20(-3.75,-5.398) 21(-3.75,-6.033) 22(-3.75,-6.667) 23(3.75,-6.667) 24(3.75,-6.032) 25(3.75,-5.397) 26(3.75,-4.762) 27(3.75,-4.127) 28(3.75,-3.492) 29(3.75,-2.857) 30(3.75,-2.222) 31(3.75,-1.587) 32(3.75,-0.952) 33(3.75,-0.317) 34(3.75,0.318) 35(3.75,0.953) 36(3.75,1.588) 37(3.75,2.223) 38(3.75,2.858) 39(3.75,3.493) 40(3.75,4.128) 41(3.75,4.763) 42(3.75,5.398) 43(3.75,6.033) 44(3.75,6.667)
  rect 5.2x14 smd paste-6.987: 45(0,0)
  silkscreen extent -5.13,-7.4 3.1,7.4, body extent -4.04,-7 4.09,7, height 1
DIONM5127X229N [mm]
  rect 2.2x1.55 smd: A(2.05,0) K(-2.05,0)
  silkscreen extent -4,-1.4 3.4,1.4
DR74-2R2-R [mil]
  rect 89x138 smd: 1(-111,0) 2(111,0)
  silkscreen extent -150,-150 150,150, body extent -150,-150 150,150, height 171
GOLDPIN4 [mil]
  rect 65x65 hole 45 paste-99999: 1(0,0)
  round 65 hole 45 paste-99999: 2(100,0) 3(200,0) 4(300,0)
  silkscreen extent -47,-47 346,47, body extent -50,-50 350,50, height 350
GOLDPIN8 [mil]
  rect 65x65 hole 45 paste-99999: 1(0,0)
  round 65 hole 45 paste-99999: 2(100,0) 3(200,0) 4(300,0) 5(400,0) 6(500,0) 7(600,0) 8(700,0)
  silkscreen extent -51,-47 752,47, body extent -50,-50 750,50, height 336
JUMPER [mm] "jumper on traces"
  rect 0.2x0.5 smd: 1(-0.65,0.025) 2(0.525,0.025)
  Top Layer region: 0.15,0 -0.1,0.75 1,0.75 1,-0.75 -0.1,-0.75
  Top Layer region: -1.1,0.75 -0.35,0.75 -0.1,0 -0.35,-0.75 -1.1,-0.75 -1.1,-0.75
  silkscreen extent -1.3,-1 1.2,1
L_1007 [mm] "Indcutor measurements from TAIYO YUDEN LSQ INDUCTOR"
  rect 1x2 smd: 1(-1.25,0) 2(1.25,0)
  silkscreen extent -0.2,-1.05 0.22,1.05, body extent -1.35,-1 1.35,1, height 2
LED_0603 [mm] "Chip Diode, 2-Leads, Body 1.60x0.80mm, IPC Medium Density"
  rect 0.8x0.8 smd: A(-0.75,0) K(0.75,0)
  silkscreen extent -1.52,-0.7 1.52,0.7, body extent -0.8,-0.4 0.8,0.4, height 0.53
LM73100_RPW0010A [mm]
  round 0.27 smd paste-0.122 mask+0: 1(-0.75,0.7) 10(0.75,0.7)
  rect 0.6x0.25 smd paste+0: 2(-0.9,0.225) 3(-0.9,-0.225) 8(0.9,-0.225) 9(0.9,0.225)
  round 0.255 smd paste-0.115 mask+0: 4(-0.75,-0.75) 7(0.75,-0.75)
  rect 0.3x2.4 smd paste-1.187: 5(-0.25,0) 6(0.25,0)
  Top Layer region: 1.15,0.85 0.85,0.85 0.85,1.15 0.8,1.2 0.65,1.2 0.6,1.15 0.6,0.6 0.65,0.55 1.15,0.55 1.2,0.6 1.2,0.8
  Top Layer region: 1.15,-0.85 0.85,-0.85 0.85,-1.15 0.8,-1.2 0.65,-1.2 0.6,-1.15 0.6,-0.6 0.65,-0.55 1.15,-0.55 1.2,-0.6 1.2,-0.8
  Top Layer region: -1.15,-0.85 -0.85,-0.85 -0.85,-1.15 -0.8,-1.2 -0.65,-1.2 -0.6,-1.15 -0.6,-0.6 -0.65,-0.55 -1.15,-0.55 -1.2,-0.6 -1.2,-0.8
  Top Layer region: -1.15,0.85 -0.85,0.85 -0.85,1.15 -0.8,1.2 -0.65,1.2 -0.6,1.15 -0.6,0.6 -0.65,0.55 -1.15,0.55 -1.2,0.6 -1.2,0.8
  silkscreen extent -1.65,-1.58 1.05,1.58, body extent -1,-1.03 1,0.97, height 1
MH2029-300T [mm] "Ferrite Bead MH2029-300T"
  rect 1.05x1.45 smd: 1(-1.025,0) 2(1.025,0)
  silkscreen extent -1.73,-0.9 1.73,0.9, body extent -1.1,-0.72 1.1,0.72, height 1.05
PCA9685_SOT788-1 [mm]
  rect 1.162x0.306 smd paste+0: 1(-2.867,1.95) 2(-2.867,1.3) 3(-2.867,0.65) 4(-2.867,0) 5(-2.867,-0.65) 6(-2.867,-1.3) 7(-2.867,-1.95) 15(2.867,-1.95) 16(2.867,-1.3) 17(2.867,-0.65) 18(2.867,0) 19(2.867,0.65) 20(2.867,1.3) 21(2.867,1.95)
  rect 0.306x1.162 smd paste+0: 8(-1.95,-2.867) 9(-1.3,-2.867) 10(-0.65,-2.867) 11(0,-2.867) 12(0.65,-2.867) 13(1.3,-2.867) 14(1.95,-2.867) 22(1.95,2.867) 23(1.3,2.867) 24(0.65,2.867) 25(0,2.867) 26(-0.65,2.867) 27(-1.3,2.867) 28(-1.95,2.867)
  rect 3.95x3.912 smd paste+0: 29(0,0)
  silkscreen extent -4.05,-3.96 3.96,3.18, body extent -3.05,-3.05 3.05,3.05, height 0.99
POWERDI3333-8 [mm]
  rect 0.7x0.42 smd paste+0: 1(-1.3,1) 2(-1.3,0.325) 3(-1.3,-0.325) 4(-1.3,-0.975) 5(1.402,-0.975) 6(1.402,-0.325) 7(1.402,0.325) 8(1.402,0.975)
  Top Layer region: -0.495,-1.185 -0.495,1.185 1.054,1.185 1.054,-1.185
  silkscreen extent -2.15,-1.8 1.8,1.8, body extent -1.65,-1.65 1.65,1.65, height 0.85
PTS526SK15SMTR2LFS [mm]
  rect 1x0.7 smd: 1(-3,1.85) 2(3,1.85) 3(-3,-1.85) 4(3,-1.85)
  silkscreen extent -4.1,-2.6 2.6,2.6, body extent -3.2,-2.55 3.2,2.55, height 1.5
R_0603 [mil]
  rect 40x40 smd: 1(-37.89,0) 2(37.89,0)
  silkscreen extent -69,-31 69,31, body extent -33,-17 33,15, height 22
R_0805 [mm] "Chip Resistor, 2-Leads, Body 2,00x1,25mm, IPC Low Density"
  rect 0.85x1.45 smd: 1(-1.175,0) 2(1.175,0)
  silkscreen extent -1.9,-1 1.9,1, body extent -1.05,-0.67 1.05,0.67, height 0.8
R_1206 [mm] "Chip Resistor, 2-Leads, Body 3,20x1,60mm, IPC Low Density"
  rect 1.7x1.95 smd: 1(-1.425,0) 2(1.425,0)
  silkscreen extent -2.5,-1.2 2.5,1.2, body extent -1.73,-0.92 1.72,0.92, height 0.65
RGV16_2P16X2P16 [mm]
  rect 0.75x0.305 smd paste+0: 1(-1.825,0.975) 2(-1.825,0.325) 3(-1.825,-0.325) 4(-1.825,-0.975) 9(1.825,-0.975) 10(1.825,-0.325) 11(1.825,0.325) 12(1.825,0.975)
  rect 0.305x0.75 smd paste+0: 5(-0.975,-1.825) 6(-0.325,-1.825) 7(0.325,-1.825) 8(0.975,-1.825) 13(0.975,1.825) 14(0.325,1.825) 15(-0.3,1.825) 16(-0.975,1.825)
  rect 2.16x2.16 smd paste-1.08: 17(0,0)
  silkscreen extent -3.34,-2.4 2.91,2.54, body extent -2.13,-2.13 2.13,2.13, height 1
RPA0010A-MFG [mm]
  rect 0.6x0.25 smd paste+0: 1(-1.4,0.75) 2(-1.4,0.25) 3(-1.4,-0.25) 4(-1.4,-0.75)
  rect 0.25x0.6 smd paste+0: 5(-0.93,-1.4) 7(0.87,-1.4) 10(-0.93,1.4)
  rect 0.25x1.7 smd paste-0.837: 6(0.37,-0.85)
  round 0.025 smd paste+0 mask+0: 8(0.99,0.8)
  rect 0.4x2.1 smd paste-1.037: 9(-0.21,0.65)
  Top Layer region: 1.1,1.7 0.8,1.7 0.75,1.65 0.75,-0.35 0.8,-0.4 1.15,-0.4 1.15,-0.375 1.66,-0.375 1.71,-0.325 1.71,-0.175 1.66,-0.125 1.15,-0.125 1.15,0.125 1.66,0.125 1.71,0.175 1.71,0.325 1.66,0.375 1.15,0.375 1.15,0.625 1.66,0.625 1.71,0.675 1.71,0.825 1.66,0.875 1.2,0.875 1.15,0.925 1.15,1.65
  silkscreen extent -2.22,-1.66 1.65,1.65, body extent -1.45,-1.53 1.55,1.47, height 1
RPW0010A-MFG [mm]
  round 0.025 smd paste-0.122 mask+0: 1(-0.75,0.7) 10(0.75,0.7)
  rect 0.6x0.25 smd paste+0: 2(-0.9,0.225) 3(-0.9,-0.225) 8(0.9,-0.225) 9(0.9,0.225)
  round 0.025 smd paste-0.115 mask+0: 4(-0.75,-0.75) 7(0.75,-0.75)
  rect 0.3x2.4 smd paste-1.187: 5(-0.25,0) 6(0.25,0)
  Top Layer region: 1.15,0.85 0.85,0.85 0.85,1.15 0.8,1.2 0.65,1.2 0.6,1.15 0.6,0.6 0.65,0.55 1.15,0.55 1.2,0.6 1.2,0.8
  Top Layer region: 1.15,-0.85 0.85,-0.85 0.85,-1.15 0.8,-1.2 0.65,-1.2 0.6,-1.15 0.6,-0.6 0.65,-0.55 1.15,-0.55 1.2,-0.6 1.2,-0.8
  Top Layer region: -1.15,-0.85 -0.85,-0.85 -0.85,-1.15 -0.8,-1.2 -0.65,-1.2 -0.6,-1.15 -0.6,-0.6 -0.65,-0.55 -1.15,-0.55 -1.2,-0.6 -1.2,-0.8
  Top Layer region: -1.15,0.85 -0.85,0.85 -0.85,1.15 -0.8,1.2 -0.65,1.2 -0.6,1.15 -0.6,0.6 -0.65,0.55 -1.15,0.55 -1.2,0.6 -1.2,0.8
  silkscreen extent -1.87,-1.58 1.05,1.58, body extent -0.99,-1.01 1.01,0.99, height 1
RYQ0021A-MFG [mm]
  rect 0.6x0.24 smd paste+0: 1(-2.4,0.75) 2(-2.4,0.25) 3(-2.4,-0.25) 4(-2.4,-0.75) 14(2.4,-0.75) 15(2.4,-0.25) 16(2.4,0.25) 17(2.4,0.75)
  rect 0.24x0.6 smd paste+0: 5(-2,-1.4) 6(-1.5,-1.4) 12(1.5,-1.4) 13(2,-1.4) 18(2,1.4) 19(1.5,1.4) 20(-1.5,1.4) 21(-2,1.4)
  rect 0.24x3.4 smd paste-1.687: 7(-1,0) 8(-0.5,0) 10(0.5,0) 11(1,0)
  round 0.025 smd paste-0.136 mask+0: 9(0,0)
  Top Layer region: -0.12,-1.175 -0.165,-1.175 -0.165,1.175 -0.12,1.175 -0.12,1.65 -0.07,1.7 0.07,1.7 0.12,1.65 0.12,1.175 0.165,1.175 0.165,-1.175 0.12,-1.175 0.12,-1.65 0.07,-1.7 -0.07,-1.7 -0.12,-1.65
  silkscreen extent -3.37,-1.55 2.55,1.55, body extent -2.5,-1.53 2.5,1.47, height 1
SOD2513X115N [mm]
  rect 1.05x0.5 smd: A(1.138,0) K(-1.138,0)
  silkscreen extent -2.3,-0.7 1.9,0.7
SOT23-6L_STM [mm]
  rect 0.972x0.558 smd paste+0: 1(-1.362,0.95) 2(-1.362,0) 3(-1.362,-0.95) 4(1.362,-0.95) 5(1.362,0) 6(1.362,0.95)
  silkscreen extent -2.1,-1.65 1,1.7, body extent -1.5,-1.52 1.5,1.52, height 1.45
SRP1265A-4R7M [mm]
  rect 4x4.9 smd: 1(-5.5,0) 2(5.5,0)
  silkscreen extent -6.75,-6.25 6.75,6.25, body extent -6.75,-6.1 6.75,6.4, height 6.4
TB00150002BE [mm]
  round 1.95 hole 1.3: 1(0,0) 2(5,0)
  silkscreen extent -2.4,-3.9 7.4,4.9, body extent -3.03,-3.8 7.47,5.2, height 12.5
TCA6424A_RGJ0032A [mm]
  oval 0.6x0.24 smd paste-0.102 mask+0.051: 1(-2.4,1.75) 2(-2.4,1.25) 3(-2.4,0.75) 4(-2.4,0.25) 5(-2.4,-0.25) 6(-2.4,-0.75) 7(-2.4,-1.25) 8(-2.4,-1.75) 17(2.4,-1.75) 18(2.4,-1.25) 19(2.4,-0.75) 20(2.4,-0.25) 21(2.4,0.25) 22(2.4,0.75) 23(2.4,1.25) 24(2.4,1.75)
  oval 0.24x0.6 smd paste-0.102 mask+0.051: 9(-1.75,-2.4) 10(-1.25,-2.4) 11(-0.75,-2.4) 12(-0.25,-2.4) 13(0.25,-2.4) 14(0.75,-2.4) 15(1.25,-2.4) 16(1.75,-2.4) 25(1.75,2.4) 26(1.25,2.4) 27(0.75,2.4) 28(0.25,2.4) 29(-0.25,2.4) 30(-0.75,2.4) 31(-1.25,2.4) 32(-1.75,2.4)
  rect 3.15x3.15 smd mask+0.051: 33(0,0)
  silkscreen extent -3.23,-2.73 2.72,2.73, body extent -2.53,-2.5 2.47,2.5, height 0.6
TP [mm]
  round 1 smd mask+0: 1(0,0)
W-QFN4040-24_TYPE_A1_DIO-M [mm]
  rect 0.857x0.255 smd paste+0: 1(-1.965,1.25) 2(-1.965,0.75) 3(-1.965,0.25) 4(-1.965,-0.25) 5(-1.965,-0.75) 6(-1.965,-1.25) 13(1.965,-1.25) 14(1.965,-0.75) 15(1.965,-0.25) 16(1.965,0.25) 17(1.965,0.75) 18(1.965,1.25)
  rect 0.255x0.857 smd paste+0: 7(-1.25,-1.965) 8(-0.75,-1.965) 9(-0.25,-1.965) 10(0.25,-1.965) 11(0.75,-1.965) 12(1.25,-1.965) 19(1.25,1.965) 20(0.75,1.965) 21(0.25,1.965) 22(-0.25,1.965) 23(-0.75,1.965) 24(-1.25,1.965)
  rect 2.743x2.743 smd paste+0: 25(0,0)
  silkscreen extent -2.9,-2.9 2.12,2.9, body extent -1.99,-1.99 1.99,1.99, height 1.4
XCVR_ESP32-S3-WROOM-1U-N16R8 [mm]
  rect 1.5x0.9 smd: 1(-8.75,8.41) 2(-8.75,7.14) 3(-8.75,5.87) 4(-8.75,4.6) 5(-8.75,3.33) 6(-8.75,2.06) 7(-8.75,0.79) 8(-8.75,-0.48) 9(-8.75,-1.75) 10(-8.75,-3.02) 11(-8.75,-4.29) 12(-8.75,-5.56) 13(-8.75,-6.83) 14(-8.75,-8.1) 27(8.75,-8.1) 28(8.75,-6.83) 29(8.75,-5.56) 30(8.75,-4.29) 31(8.75,-3.02) 32(8.75,-1.75) 33(8.75,-0.48) 34(8.75,0.79) 35(8.75,2.06) 36(8.75,3.33) 37(8.75,4.6) 38(8.75,5.87) 39(8.75,7.14) 40(8.75,8.41)
  rect 0.9x1.5 smd: 15(-6.985,-9.35) 16(-5.715,-9.35) 17(-4.445,-9.35) 18(-3.175,-9.35) 19(-1.905,-9.35) 20(-0.635,-9.35) 21(0.635,-9.35) 22(1.905,-9.35) 23(3.175,-9.35) 24(4.445,-9.35) 25(5.715,-9.35) 26(6.985,-9.35)
  rect 0.9x0.9 smd: 41_1(-2.9,2.09) 41_2(-1.5,2.09) 41_3(-0.1,2.09) 41_4(-2.9,0.69) 41_5(-1.5,0.69) 41_6(-0.1,0.69) 41_7(-2.9,-0.71) 41_8(-1.5,-0.71) 41_9(-0.1,-0.71)
  silkscreen extent -10.6,-9.6 9,9.6, body extent -9,-9.6 9,9.6, height 3.35
XT60U-M [mm]
  rect 6x6 / inner round 6 / far side rect 6x6 hole 4.55: 1(-3.6,0)
  round 6 hole 4.55: 2(3.6,0)
  silkscreen extent -9.5,-4.05 9.5,4.05, body extent -7.75,-4.05 7.75,4.05, height 16